# EAGLE board femtoBeacon_r2.0.1_PANELIZED (EAGLE 7.6.0), part 1 of 9
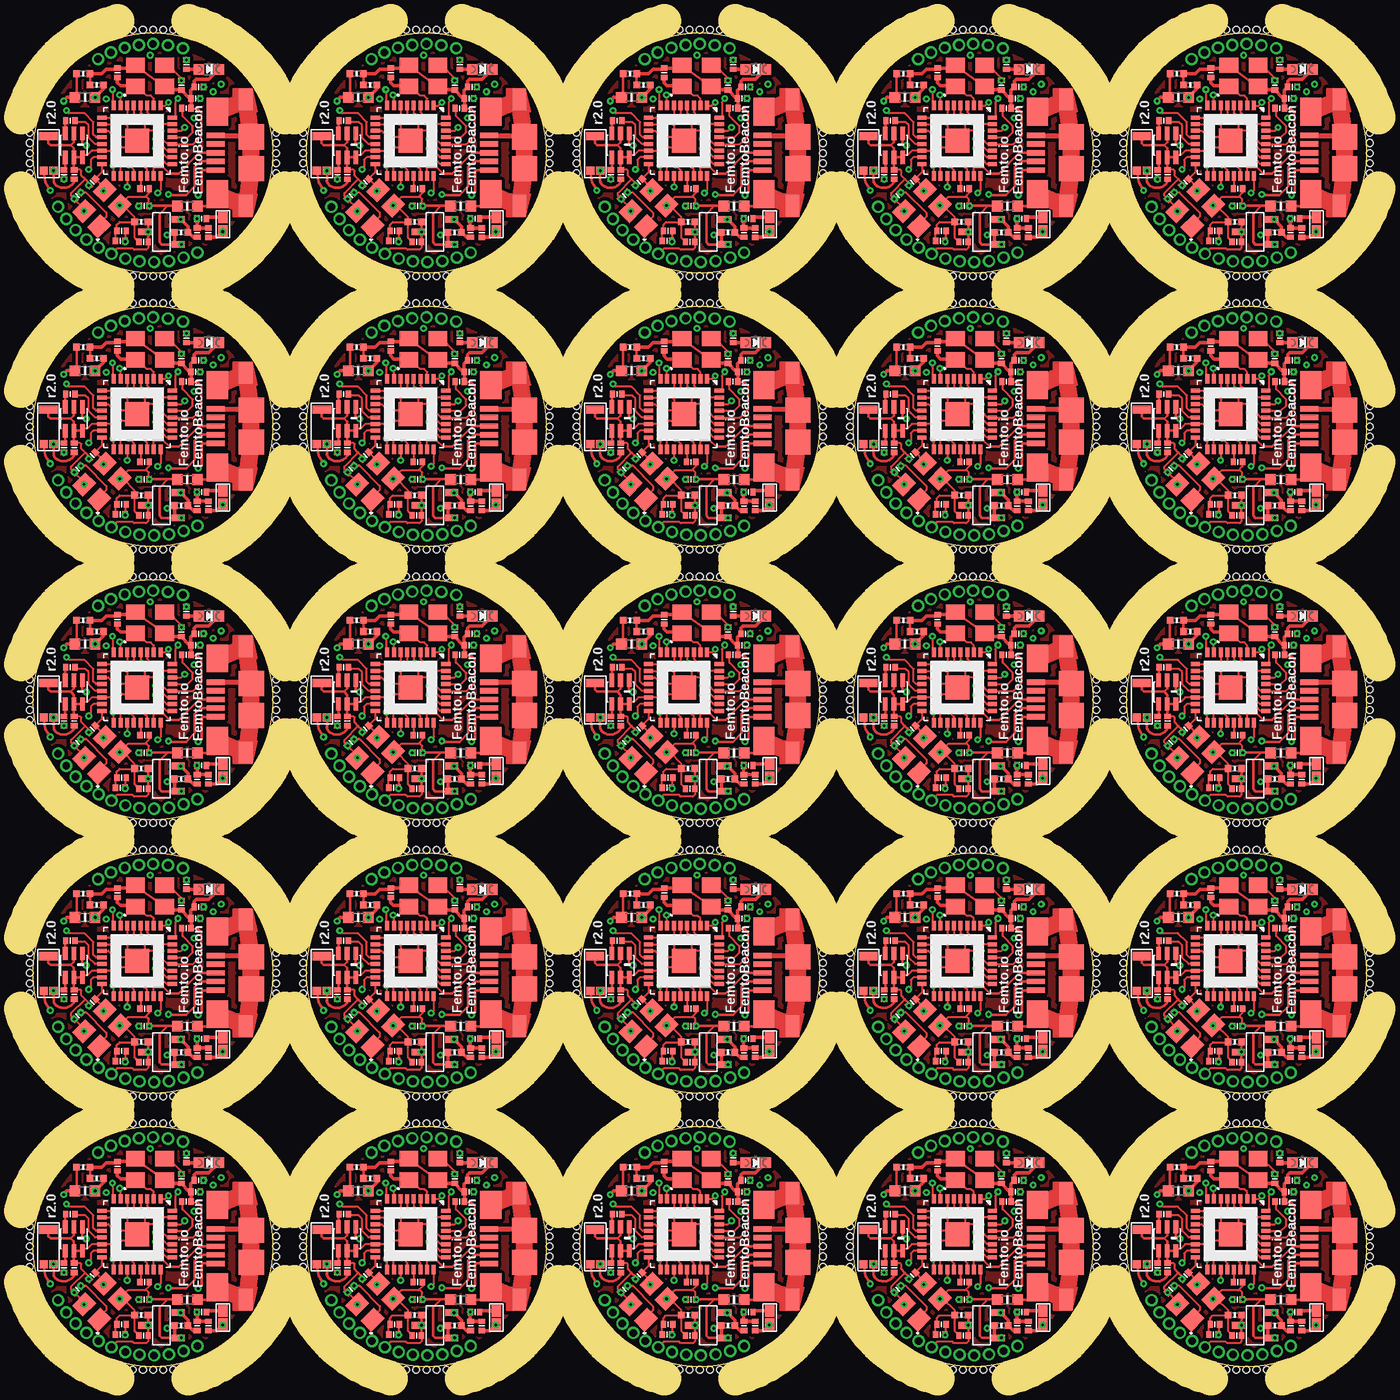
[diagram p0: board, top side]
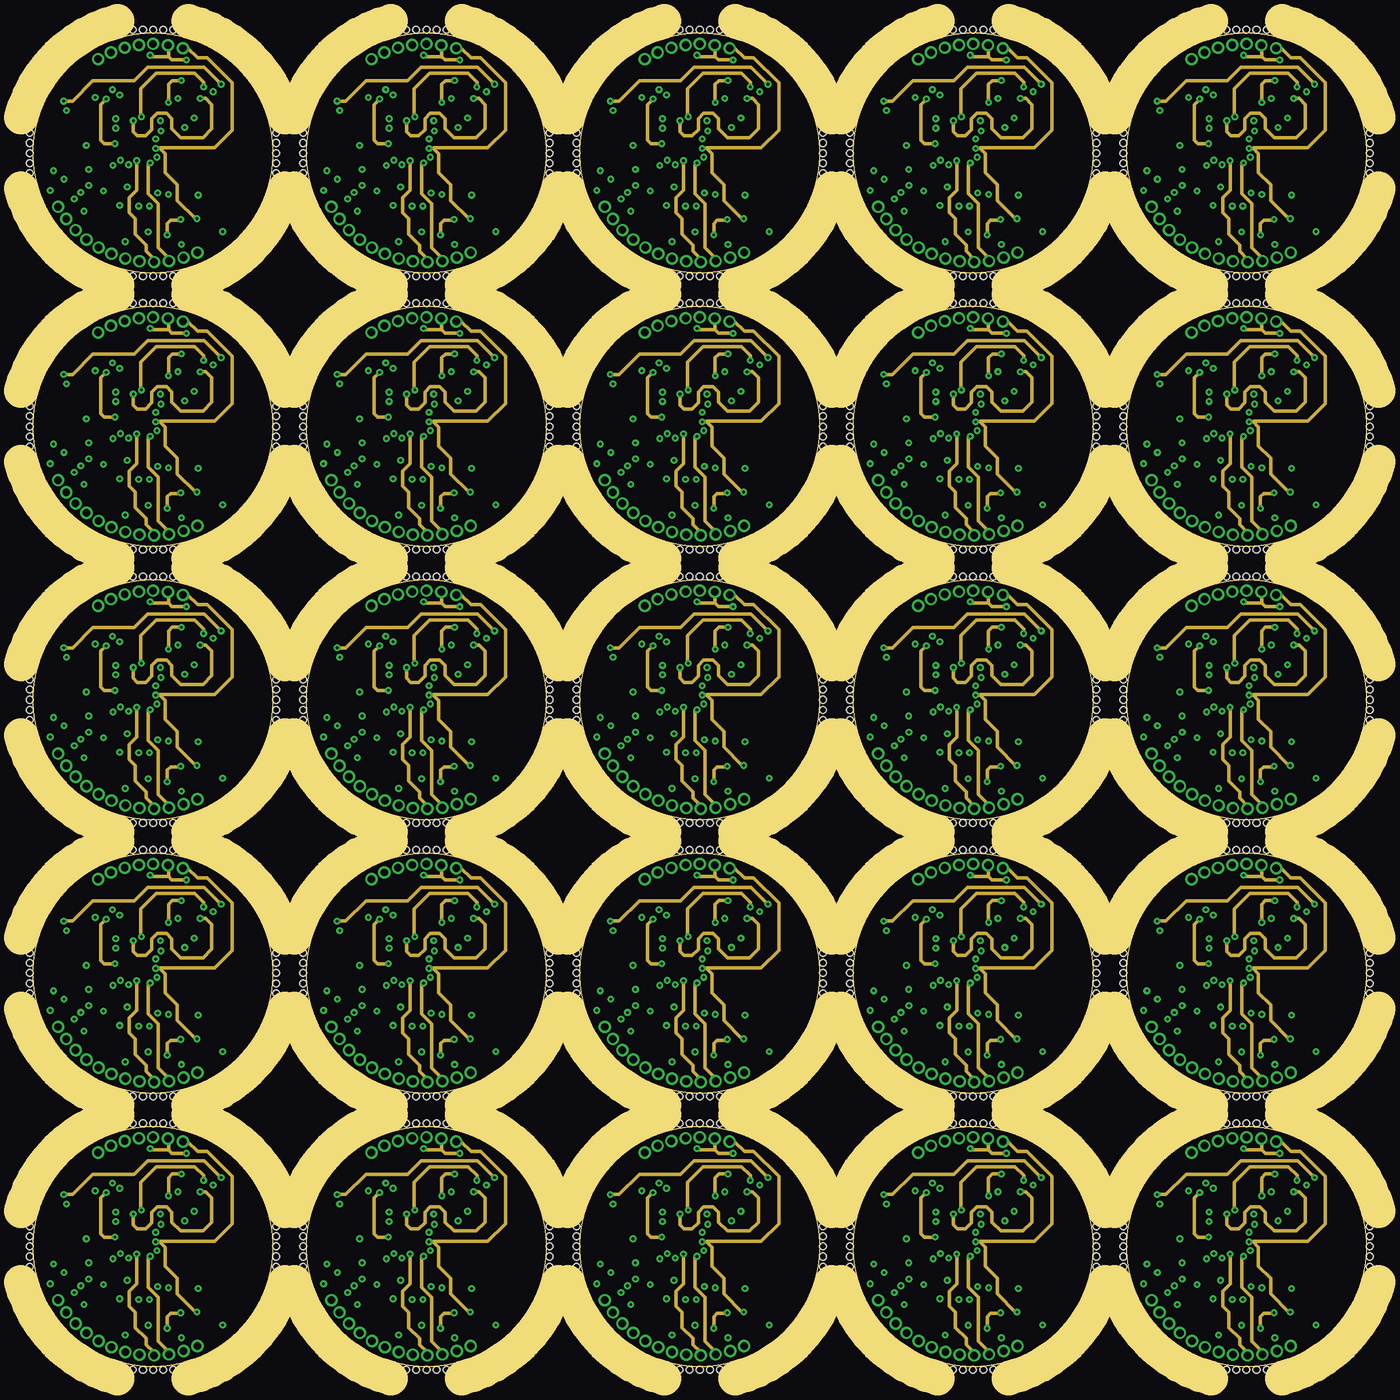
[diagram p1: board, inner layer Route2]
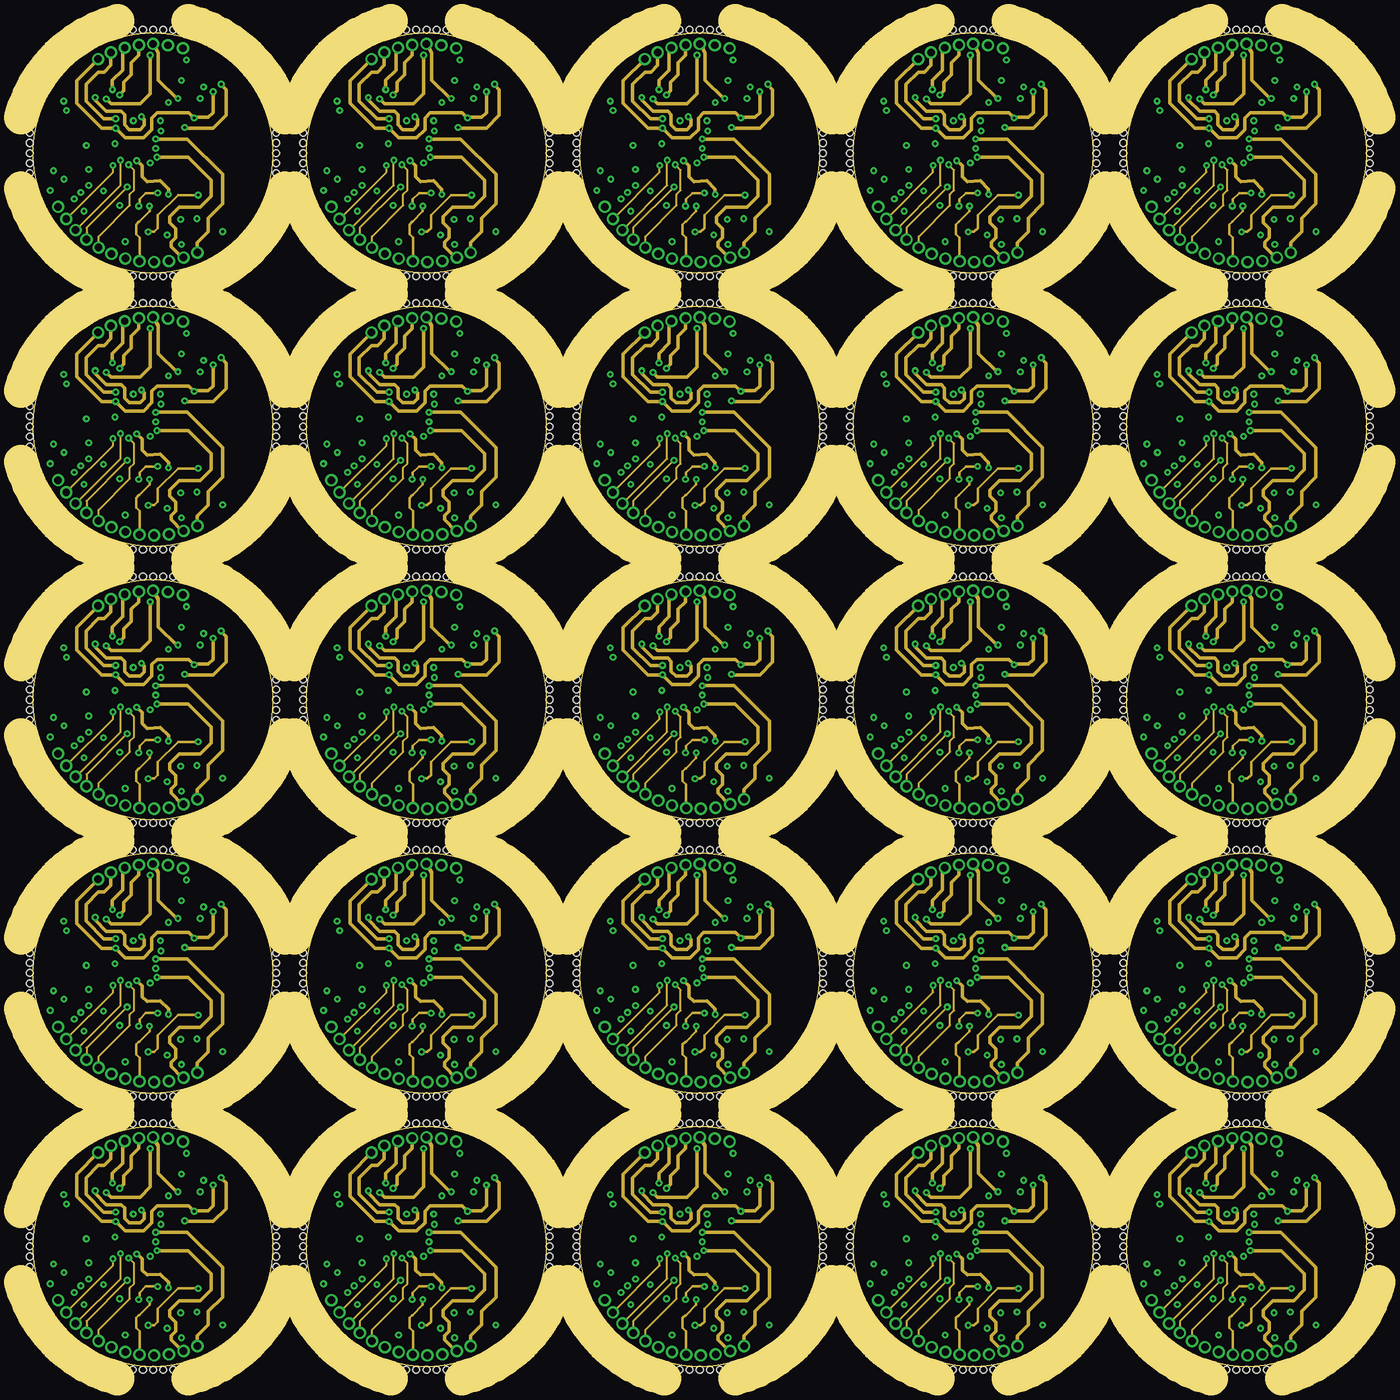
[diagram p2: board, inner layer Route15]
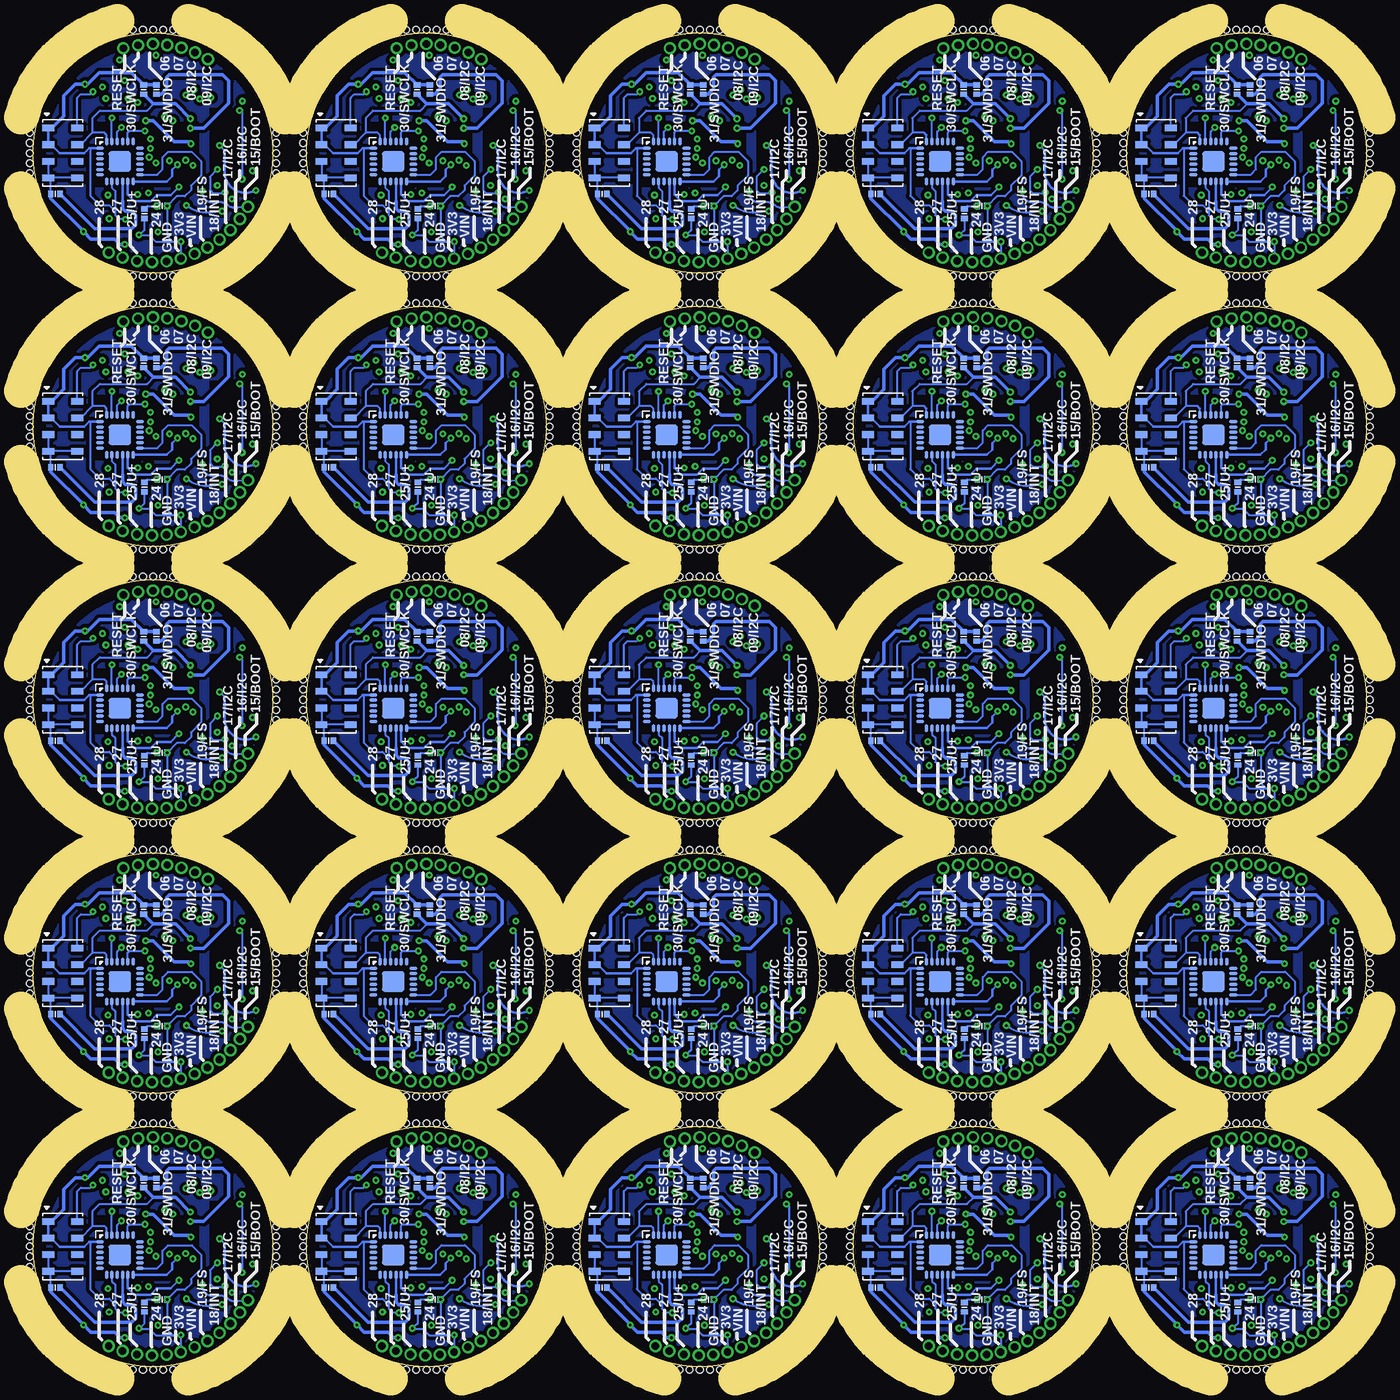
[diagram p3: board, bottom side, seen from below]

Size 100.16 x 100.16 mm. Coordinates in mm from the lower left corner, seen from the top.
Outline: circle at 9,9 radius 9
Outline: circle at 9,29.54 radius 9
Outline: circle at 9,50.08 radius 9
Outline: circle at 9,70.62 radius 9
Outline: circle at 9,91.16 radius 9
Outline: circle at 29.54,9 radius 9
Outline: circle at 29.54,29.54 radius 9
Outline: circle at 29.54,50.08 radius 9
Outline: circle at 29.54,70.62 radius 9
Outline: circle at 29.54,91.16 radius 9
Outline: circle at 50.08,9 radius 9
Outline: circle at 50.08,29.54 radius 9
Outline: circle at 50.08,50.08 radius 9
Outline: circle at 50.08,70.62 radius 9
Outline: circle at 50.08,91.16 radius 9
Outline: circle at 70.62,9 radius 9
Outline: circle at 70.62,29.54 radius 9
Outline: circle at 70.62,50.08 radius 9
Outline: circle at 70.62,70.62 radius 9
Outline: circle at 70.62,91.16 radius 9
Copper layers (1+2*15+16): Top 0.035mm / dielectric 0.7mm / Route2 0.035mm / dielectric 0.15mm / Route15 0.035mm / dielectric 0.2mm / Bottom 0.035mm
Design rules "AQS_custom_4layer": minimum track width 5mil, minimum drill 5mil, track to track 6mil, track to pad 6mil, pad to pad 6mil, via to via 6mil, smd to smd 1mil, copper to edge 15mil, drill to drill 6mil, minimum pad ring 7mil, minimum via ring 3mil, stop-mask expansion 2mil, vias tented up to drill 10mil, thermal gap 10mil
Holes 0.51 mm at -0.25,9 -0.25,9.76 -0.25,10.52 -0.25,8.24 -0.25,7.48 18.25,9 18.25,8.24 18.25,7.48 18.25,9.76 18.25,10.52 9,-0.25 8.24,-0.25 7.48,-0.25 9.76,-0.25 10.52,-0.25 9,18.25 9.76,18.25 10.52,18.25 8.24,18.25 7.48,18.25 -0.25,29.54 -0.25,30.3 -0.25,31.06 -0.25,28.78 -0.25,28.02 18.25,29.54 18.25,28.78 18.25,28.02 18.25,30.3 18.25,31.06 9,20.29 8.24,20.29 7.48,20.29 9.76,20.29 10.52,20.29 9,38.79 9.76,38.79 10.52,38.79 8.24,38.79 7.48,38.79 -0.25,50.08 -0.25,50.84 -0.25,51.6 -0.25,49.32 -0.25,48.56 18.25,50.08 18.25,49.32 18.25,48.56 18.25,50.84 18.25,51.6 9,40.83 8.24,40.83 7.48,40.83 9.76,40.83 10.52,40.83 9,59.33 9.76,59.33 10.52,59.33 8.24,59.33 7.48,59.33 -0.25,70.62 -0.25,71.38 -0.25,72.14 -0.25,69.86 -0.25,69.1 18.25,70.62 18.25,69.86 18.25,69.1 18.25,71.38 18.25,72.14 9,61.37 8.24,61.37 7.48,61.37 9.76,61.37 10.52,61.37 9,79.87 9.76,79.87 10.52,79.87 8.24,79.87 7.48,79.87 -0.25,91.16 -0.25,91.92 -0.25,92.68 -0.25,90.4 -0.25,89.64 18.25,91.16 18.25,90.4 18.25,89.64 18.25,91.92 18.25,92.68 9,81.91 8.24,81.91 7.48,81.91 9.76,81.91 10.52,81.91 9,100.41 9.76,100.41 10.52,100.41 8.24,100.41 7.48,100.41 20.29,9 20.29,9.76 20.29,10.52 20.29,8.24 20.29,7.48 38.79,9 38.79,8.24 38.79,7.48 38.79,9.76 38.79,10.52 29.54,-0.25 28.78,-0.25 28.02,-0.25 30.3,-0.25 31.06,-0.25 29.54,18.25 30.3,18.25 31.06,18.25 28.78,18.25 28.02,18.25 20.29,29.54 20.29,30.3 20.29,31.06 20.29,28.78 20.29,28.02 38.79,29.54 38.79,28.78 38.79,28.02 38.79,30.3 38.79,31.06 29.54,20.29 28.78,20.29 28.02,20.29 30.3,20.29 31.06,20.29 29.54,38.79 30.3,38.79 31.06,38.79 28.78,38.79 28.02,38.79 20.29,50.08 20.29,50.84 20.29,51.6 20.29,49.32 20.29,48.56 38.79,50.08 38.79,49.32 38.79,48.56 38.79,50.84 38.79,51.6 29.54,40.83 28.78,40.83 28.02,40.83 30.3,40.83 31.06,40.83 29.54,59.33 30.3,59.33 31.06,59.33 28.78,59.33 28.02,59.33 20.29,70.62 20.29,71.38 20.29,72.14 20.29,69.86 20.29,69.1 38.79,70.62 38.79,69.86 38.79,69.1 38.79,71.38 38.79,72.14 29.54,61.37 28.78,61.37 28.02,61.37 30.3,61.37 31.06,61.37 29.54,79.87 30.3,79.87 31.06,79.87 28.78,79.87 28.02,79.87 20.29,91.16 20.29,91.92 20.29,92.68 20.29,90.4 20.29,89.64 38.79,91.16 38.79,90.4 38.79,89.64 38.79,91.92 38.79,92.68 29.54,81.91 28.78,81.91 28.02,81.91 30.3,81.91 31.06,81.91 29.54,100.41 30.3,100.41 31.06,100.41 28.78,100.41 28.02,100.41 40.83,9 40.83,9.76 40.83,10.52 40.83,8.24 40.83,7.48 59.33,9 59.33,8.24 59.33,7.48 59.33,9.76 59.33,10.52 50.08,-0.25 49.32,-0.25 48.56,-0.25 50.84,-0.25 51.6,-0.25 50.08,18.25 50.84,18.25 51.6,18.25 49.32,18.25 48.56,18.25 40.83,29.54 40.83,30.3 40.83,31.06 40.83,28.78 40.83,28.02 59.33,29.54 59.33,28.78 59.33,28.02 59.33,30.3 59.33,31.06 50.08,20.29 49.32,20.29 48.56,20.29 50.84,20.29 51.6,20.29 50.08,38.79 50.84,38.79 51.6,38.79 49.32,38.79 48.56,38.79 40.83,50.08 40.83,50.84 40.83,51.6 40.83,49.32 40.83,48.56 59.33,50.08 59.33,49.32 59.33,48.56 59.33,50.84 59.33,51.6 50.08,40.83 49.32,40.83 48.56,40.83 50.84,40.83 51.6,40.83 50.08,59.33 50.84,59.33 51.6,59.33 49.32,59.33 48.56,59.33 40.83,70.62 40.83,71.38 40.83,72.14 40.83,69.86 40.83,69.1 59.33,70.62 59.33,69.86 59.33,69.1 59.33,71.38 59.33,72.14 50.08,61.37 49.32,61.37 48.56,61.37 50.84,61.37 51.6,61.37 50.08,79.87 50.84,79.87 51.6,79.87 49.32,79.87 48.56,79.87 40.83,91.16 40.83,91.92 40.83,92.68 40.83,90.4 40.83,89.64 59.33,91.16 59.33,90.4 59.33,89.64 59.33,91.92 59.33,92.68 50.08,81.91 49.32,81.91 48.56,81.91 50.84,81.91 51.6,81.91 50.08,100.41 50.84,100.41 51.6,100.41 49.32,100.41 48.56,100.41 61.37,9 61.37,9.76 61.37,10.52 61.37,8.24 61.37,7.48 79.87,9 79.87,8.24 79.87,7.48 79.87,9.76 79.87,10.52 70.62,-0.25 69.86,-0.25 69.1,-0.25 71.38,-0.25 72.14,-0.25 70.62,18.25 71.38,18.25 72.14,18.25 69.86,18.25 69.1,18.25 61.37,29.54 61.37,30.3 61.37,31.06 61.37,28.78 61.37,28.02 79.87,29.54 79.87,28.78 79.87,28.02 79.87,30.3 79.87,31.06 70.62,20.29 69.86,20.29 69.1,20.29 71.38,20.29 72.14,20.29 70.62,38.79 71.38,38.79 72.14,38.79 69.86,38.79 69.1,38.79 61.37,50.08 61.37,50.84 61.37,51.6 61.37,49.32 61.37,48.56 79.87,50.08 79.87,49.32 79.87,48.56 79.87,50.84 79.87,51.6 70.62,40.83 69.86,40.83 69.1,40.83 71.38,40.83 72.14,40.83 70.62,59.33 71.38,59.33 72.14,59.33 69.86,59.33 69.1,59.33 61.37,70.62 61.37,71.38 61.37,72.14 61.37,69.86 61.37,69.1 79.87,70.62 79.87,69.86 79.87,69.1 79.87,71.38 79.87,72.14 70.62,61.37 69.86,61.37 69.1,61.37 71.38,61.37 72.14,61.37 70.62,79.87 71.38,79.87 72.14,79.87 69.86,79.87 69.1,79.87 61.37,91.16 61.37,91.92 61.37,92.68 61.37,90.4 61.37,89.64 79.87,91.16 79.87,90.4 79.87,89.64 79.87,91.92 79.87,92.68 70.62,81.91 69.86,81.91 69.1,81.91 71.38,81.91 72.14,81.91 70.62,100.41 71.38,100.41 72.14,100.41 69.86,100.41 69.1,100.41 81.91,9 81.91,9.76 81.91,10.52 81.91,8.24 81.91,7.48 100.41,9 100.41,8.24 100.41,7.48 100.41,9.76 100.41,10.52 91.16,-0.25 90.4,-0.25 89.64,-0.25 91.92,-0.25 92.68,-0.25 91.16,18.25 91.92,18.25 92.68,18.25 90.4,18.25 89.64,18.25 81.91,29.54 81.91,30.3 81.91,31.06 81.91,28.78 81.91,28.02 100.41,29.54 100.41,28.78 100.41,28.02 100.41,30.3 100.41,31.06 91.16,20.29 90.4,20.29 89.64,20.29 91.92,20.29 92.68,20.29 91.16,38.79 91.92,38.79 92.68,38.79 90.4,38.79 89.64,38.79 81.91,50.08 81.91,50.84 81.91,51.6 81.91,49.32 81.91,48.56 100.41,50.08 100.41,49.32 100.41,48.56 100.41,50.84 100.41,51.6 91.16,40.83 90.4,40.83 89.64,40.83 91.92,40.83 92.68,40.83 91.16,59.33 91.92,59.33 92.68,59.33 90.4,59.33 89.64,59.33 81.91,70.62 81.91,71.38 81.91,72.14 81.91,69.86 81.91,69.1 100.41,70.62 100.41,69.86 100.41,69.1 100.41,71.38 100.41,72.14 91.16,61.37 90.4,61.37 89.64,61.37 91.92,61.37 92.68,61.37 91.16,79.87 91.92,79.87 92.68,79.87 90.4,79.87 89.64,79.87 81.91,91.16 81.91,91.92 81.91,92.68 81.91,90.4 81.91,89.64 100.41,91.16 100.41,90.4 100.41,89.64 100.41,91.92 100.41,92.68 91.16,81.91 90.4,81.91 89.64,81.91 91.92,81.91 92.68,81.91 91.16,100.41 91.92,100.41 92.68,100.41 90.4,100.41 89.64,100.41
Milling: 100 lines

## Footprints (pad centres in the part's own frame; a part is rotated, then mirrored left to right if it is on the bottom)
ANT_BAR = smd 0.62 x 0.61: 1 -1.3,0.37; 2 -1.3,-0.38 | smd 0.62 x 1.36: 3 1.3,0
0805_BALUN = smd 1 x 0.35: 1 -0.9,0.65; 2 -0.9,0; 3 -0.9,-0.65; 4 0.9,-0.65; 5 0.9,0; 6 0.9,0.65
MS5611-01BA03 = smd 0.9 x 0.5: 1 -1.1,1.875; 2 -1.1,0.625; 3 -1.1,-0.625; 4 -1.1,-1.875; 5 1.1,-1.875; 6 1.1,-0.625; 7 1.1,0.625; 8 1.1,1.875
SPST_SMD = smd 0.889 x 0.699: 1 -0.508,0; 2 0.508,0
PART = smd 0.4 x 0.5: 1 -0.35,0; 2 0.35,0
_0402MP = smd 0.5 x 0.5: 1 -0.508,0; 2 0.508,0
_0603MP = smd 0.8 x 0.8: 1 -0.762,0; 2 0.762,0
QFN32 = smd 0.7 x 0.3: 1 -2.65,1.75; 2 -2.65,1.25; 3 -2.65,0.75; 4 -2.65,0.25; 5 -2.65,-0.25; 6 -2.65,-0.75; 7 -2.65,-1.25; 8 -2.65,-1.75; 17 2.65,-1.75; 18 2.65,-1.25; 19 2.65,-0.75; 20 2.65,-0.25; 21 2.65,0.25; 22 2.65,0.75; 23 2.65,1.25; 24 2.65,1.75 | smd 0.3 x 0.7: 9 -1.75,-2.65; 10 -1.25,-2.65; 11 -0.75,-2.65; 12 -0.25,-2.65; 13 0.25,-2.65; 14 0.75,-2.65; 15 1.25,-2.65; 16 1.75,-2.65; 25 1.75,2.65; 26 1.25,2.65; 27 0.75,2.65; 28 0.25,2.65; 29 -0.25,2.65; 30 -0.75,2.65; 31 -1.25,2.65; 32 -1.75,2.65 | smd 1.8 x 1.8: 33 0,0
QFN_3X3MM = smd 0.6 x 0.25: P$1 -1.5,1; P$2 -1.5,0.6; P$3 -1.5,0.2; P$4 -1.5,-0.2; P$5 -1.5,-0.6; P$6 -1.5,-1; P$13 1.5,-1; P$14 1.5,-0.6; P$15 1.5,-0.2; P$16 1.5,0.2; P$17 1.5,0.6; P$18 1.5,1 | smd 0.25 x 0.6: P$7 -1,-1.5; P$8 -0.6,-1.5; P$9 -0.2,-1.5; P$10 0.2,-1.5; P$11 0.6,-1.5; P$12 1,-1.5; P$19 1,1.5; P$20 0.6,1.5; P$21 0.2,1.5; P$22 -0.2,1.5; P$23 -0.6,1.5; P$24 -1,1.5 | smd 1.7 x 1.54: P$25 0,0
MCP1700T-3302E/TT = smd 0.5 x 1: GND -0.95,-1.25; VIN 0,1.25; VOUT 0.95,-1.25
CHIPLED_0603_NOOUTLINE = smd 0.8 x 0.8: A 0,-0.75; C 0,0.75
1X1_ROUND = drill 0.559 pad 0.864: P$1 0,0
USB_MICROB_PACKAGE = smd 0.4 x 1.35: 1 -1.3,1.47; 2 -0.64,1.47; 3 0,1.47; 4 0.66,1.47; 5 1.3,1.47 | smd 2.1 x 1.6: 6 -3.1,1.35; 11 3.1,1.35 | smd 1.6 x 1: 7 -4,-0.8; 10 4,-0.8 | smd 1.9 x 1.9: 8 -1.2,-1.2; 9 1.2,-1.2
TSX-3225 = smd 1.4 x 1.15: 1 -1.1,-0.8; 2 1.1,-0.8; 3 1.1,0.8; 4 -1.1,0.8

## Placement (x,y rotation side)
ANT  PULSE_ANT_2.4GHZ  [ANT_BAR]  1.14,8.97 90 top
ANT1  PULSE_ANT_2.4GHZ  [ANT_BAR]  1.14,29.51 90 top
ANT2  PULSE_ANT_2.4GHZ  [ANT_BAR]  1.14,50.05 90 top
ANT3  PULSE_ANT_2.4GHZ  [ANT_BAR]  1.14,70.59 90 top
ANT4  PULSE_ANT_2.4GHZ  [ANT_BAR]  1.14,91.13 90 top
ANT5  PULSE_ANT_2.4GHZ  [ANT_BAR]  21.68,8.97 90 top
ANT6  PULSE_ANT_2.4GHZ  [ANT_BAR]  21.68,29.51 90 top
ANT7  PULSE_ANT_2.4GHZ  [ANT_BAR]  21.68,50.05 90 top
ANT8  PULSE_ANT_2.4GHZ  [ANT_BAR]  21.68,70.59 90 top
ANT9  PULSE_ANT_2.4GHZ  [ANT_BAR]  21.68,91.13 90 top
ANT10  PULSE_ANT_2.4GHZ  [ANT_BAR]  42.22,8.97 90 top
ANT11  PULSE_ANT_2.4GHZ  [ANT_BAR]  42.22,29.51 90 top
ANT12  PULSE_ANT_2.4GHZ  [ANT_BAR]  42.22,50.05 90 top
ANT13  PULSE_ANT_2.4GHZ  [ANT_BAR]  42.22,70.59 90 top
ANT14  PULSE_ANT_2.4GHZ  [ANT_BAR]  42.22,91.13 90 top
ANT15  PULSE_ANT_2.4GHZ  [ANT_BAR]  62.76,8.97 90 top
ANT16  PULSE_ANT_2.4GHZ  [ANT_BAR]  62.76,29.51 90 top
ANT17  PULSE_ANT_2.4GHZ  [ANT_BAR]  62.76,50.05 90 top
ANT18  PULSE_ANT_2.4GHZ  [ANT_BAR]  62.76,70.59 90 top
ANT19  PULSE_ANT_2.4GHZ  [ANT_BAR]  62.76,91.13 90 top
ANT20  PULSE_ANT_2.4GHZ  [ANT_BAR]  83.3,8.97 90 top
ANT21  PULSE_ANT_2.4GHZ  [ANT_BAR]  83.3,29.51 90 top
ANT22  PULSE_ANT_2.4GHZ  [ANT_BAR]  83.3,50.05 90 top
ANT23  PULSE_ANT_2.4GHZ  [ANT_BAR]  83.3,70.59 90 top
ANT24  PULSE_ANT_2.4GHZ  [ANT_BAR]  83.3,91.13 90 top
BAL  JOHANSON_2450BM15A0015E  [0805_BALUN]  3.05,9.58 270 top
BAL1  JOHANSON_2450BM15A0015E  [0805_BALUN]  3.05,30.12 270 top
BAL2  JOHANSON_2450BM15A0015E  [0805_BALUN]  3.05,50.66 270 top
BAL3  JOHANSON_2450BM15A0015E  [0805_BALUN]  3.05,71.2 270 top
BAL4  JOHANSON_2450BM15A0015E  [0805_BALUN]  3.05,91.74 270 top
BAL5  JOHANSON_2450BM15A0015E  [0805_BALUN]  23.59,9.58 270 top
BAL6  JOHANSON_2450BM15A0015E  [0805_BALUN]  23.59,30.12 270 top
BAL7  JOHANSON_2450BM15A0015E  [0805_BALUN]  23.59,50.66 270 top
BAL8  JOHANSON_2450BM15A0015E  [0805_BALUN]  23.59,71.2 270 top
BAL9  JOHANSON_2450BM15A0015E  [0805_BALUN]  23.59,91.74 270 top
BAL10  JOHANSON_2450BM15A0015E  [0805_BALUN]  44.13,9.58 270 top
BAL11  JOHANSON_2450BM15A0015E  [0805_BALUN]  44.13,30.12 270 top
BAL12  JOHANSON_2450BM15A0015E  [0805_BALUN]  44.13,50.66 270 top
BAL13  JOHANSON_2450BM15A0015E  [0805_BALUN]  44.13,71.2 270 top
BAL14  JOHANSON_2450BM15A0015E  [0805_BALUN]  44.13,91.74 270 top
BAL15  JOHANSON_2450BM15A0015E  [0805_BALUN]  64.67,9.58 270 top
BAL16  JOHANSON_2450BM15A0015E  [0805_BALUN]  64.67,30.12 270 top
BAL17  JOHANSON_2450BM15A0015E  [0805_BALUN]  64.67,50.66 270 top
BAL18  JOHANSON_2450BM15A0015E  [0805_BALUN]  64.67,71.2 270 top
BAL19  JOHANSON_2450BM15A0015E  [0805_BALUN]  64.67,91.74 270 top
BAL20  JOHANSON_2450BM15A0015E  [0805_BALUN]  85.21,9.58 270 top
BAL21  JOHANSON_2450BM15A0015E  [0805_BALUN]  85.21,30.12 270 top
BAL22  JOHANSON_2450BM15A0015E  [0805_BALUN]  85.21,50.66 270 top
BAL23  JOHANSON_2450BM15A0015E  [0805_BALUN]  85.21,71.2 270 top
BAL24  JOHANSON_2450BM15A0015E  [0805_BALUN]  85.21,91.74 270 top
BARO  MS5611-01BA03  [MS5611-01BA03]  15.79,9.01 0 bottom
BARO1  MS5611-01BA03  [MS5611-01BA03]  15.79,29.55 0 bottom
BARO2  MS5611-01BA03  [MS5611-01BA03]  15.79,50.09 0 bottom
BARO3  MS5611-01BA03  [MS5611-01BA03]  15.79,70.63 0 bottom
BARO4  MS5611-01BA03  [MS5611-01BA03]  15.79,91.17 0 bottom
BARO5  MS5611-01BA03  [MS5611-01BA03]  36.33,9.01 0 bottom
BARO6  MS5611-01BA03  [MS5611-01BA03]  36.33,29.55 0 bottom
BARO7  MS5611-01BA03  [MS5611-01BA03]  36.33,50.09 0 bottom
BARO8  MS5611-01BA03  [MS5611-01BA03]  36.33,70.63 0 bottom
BARO9  MS5611-01BA03  [MS5611-01BA03]  36.33,91.17 0 bottom
BARO10  MS5611-01BA03  [MS5611-01BA03]  56.87,9.01 0 bottom
BARO11  MS5611-01BA03  [MS5611-01BA03]  56.87,29.55 0 bottom
BARO12  MS5611-01BA03  [MS5611-01BA03]  56.87,50.09 0 bottom
BARO13  MS5611-01BA03  [MS5611-01BA03]  56.87,70.63 0 bottom
BARO14  MS5611-01BA03  [MS5611-01BA03]  56.87,91.17 0 bottom
BARO15  MS5611-01BA03  [MS5611-01BA03]  77.41,9.01 0 bottom
BARO16  MS5611-01BA03  [MS5611-01BA03]  77.41,29.55 0 bottom
BARO17  MS5611-01BA03  [MS5611-01BA03]  77.41,50.09 0 bottom
BARO18  MS5611-01BA03  [MS5611-01BA03]  77.41,70.63 0 bottom
BARO19  MS5611-01BA03  [MS5611-01BA03]  77.41,91.17 0 bottom
BARO20  MS5611-01BA03  [MS5611-01BA03]  97.95,9.01 0 bottom
BARO21  MS5611-01BA03  [MS5611-01BA03]  97.95,29.55 0 bottom
BARO22  MS5611-01BA03  [MS5611-01BA03]  97.95,50.09 0 bottom
BARO23  MS5611-01BA03  [MS5611-01BA03]  97.95,70.63 0 bottom
BARO24  MS5611-01BA03  [MS5611-01BA03]  97.95,91.17 0 bottom
BTN  DNP  [SPST_SMD]  14.25,3.66 270 top
BTN1  DNP  [SPST_SMD]  14.25,24.2 270 top
BTN2  DNP  [SPST_SMD]  14.25,44.74 270 top
BTN3  DNP  [SPST_SMD]  14.25,65.28 270 top
BTN4  DNP  [SPST_SMD]  14.25,85.82 270 top
BTN5  DNP  [SPST_SMD]  34.79,3.66 270 top
BTN6  DNP  [SPST_SMD]  34.79,24.2 270 top
BTN7  DNP  [SPST_SMD]  34.79,44.74 270 top
BTN8  DNP  [SPST_SMD]  34.79,65.28 270 top
BTN9  DNP  [SPST_SMD]  34.79,85.82 270 top
BTN10  DNP  [SPST_SMD]  55.33,3.66 270 top
BTN11  DNP  [SPST_SMD]  55.33,24.2 270 top
BTN12  DNP  [SPST_SMD]  55.33,44.74 270 top
BTN13  DNP  [SPST_SMD]  55.33,65.28 270 top
BTN14  DNP  [SPST_SMD]  55.33,85.82 270 top
BTN15  DNP  [SPST_SMD]  75.87,3.66 270 top
BTN16  DNP  [SPST_SMD]  75.87,24.2 270 top
BTN17  DNP  [SPST_SMD]  75.87,44.74 270 top
BTN18  DNP  [SPST_SMD]  75.87,65.28 270 top
BTN19  DNP  [SPST_SMD]  75.87,85.82 270 top
BTN20  DNP  [SPST_SMD]  96.41,3.66 270 top
BTN21  DNP  [SPST_SMD]  96.41,24.2 270 top
BTN22  DNP  [SPST_SMD]  96.41,44.74 270 top
BTN23  DNP  [SPST_SMD]  96.41,65.28 270 top
BTN24  DNP  [SPST_SMD]  96.41,85.82 270 top
C1  0.1uF  [PART]  13.16,3.02 270 top
C2  0.1uF  [PART]  8.36,6.32 0 top
C3  10pF  [PART]  3.33,5.79 45 top
C4  10pF  [PART]  4.42,6.81 225 top
C5  2.2uF  [_0402MP]  11.13,3.05 180 top
C6  2.2uF  [_0402MP]  8.13,3.83 180 top
C7  0.47uF  [PART]  8.28,2.31 180 top
C8  0.1uF  [PART]  12.45,13.97 180 top
C9  0.1uF  [PART]  11.51,12.37 0 top
C10  0.1uF  [PART]  6.63,3.15 180 top
C11  22pF, C0G, 5%  [PART]  2.79,11.43 180 top
C12  22pF, C0G, 5%  [PART]  2.31,7.39 90 top
C13  DNP  [PART]  3.07,7.39 90 top
C14  9pF  [PART]  6.32,15.04 270 top
C15  9pF  [PART]  11.13,14.1 270 top
C16  0.1uF  [PART]  8.33,5.02 0 top
C17  0.1uF  [PART]  12.19,13.11 180 top
C18  0.1uF  [PART]  13.16,23.56 270 top
C19  0.1uF  [PART]  8.36,26.86 0 top
C20  2.2uF  [_0402MP]  11.13,23.59 180 top
C21  10uF  [_0402MP]  3.76,14.96 180 top
C22  10uF  [_0402MP]  4.78,14.12 0 top
C23  2.2uF  [_0402MP]  8.13,24.37 180 top
C24  0.47uF  [PART]  8.28,22.85 180 top
C25  0.1uF  [PART]  9.65,24.99 90 bottom
C26  0.1uF  [PART]  12.45,34.51 180 top
C27  0.1uF  [PART]  11.51,32.91 0 top
C28  0.1uF  [PART]  8.33,25.56 0 top
C29  0.1uF  [PART]  9.65,4.45 90 bottom
C30  0.1uF  [PART]  8.33,5.02 0 bottom
C31  10nF  [PART]  6.53,2.39 0 top
C32  0.1uF  [PART]  16.33,5.92 180 bottom
C33  0.1uF  [PART]  12.19,33.65 180 top
C34  10uF  [_0402MP]  3.76,35.5 180 top
C35  10uF  [_0402MP]  4.78,34.66 0 top
C36  0.1uF  [PART]  6.63,23.69 180 top
C37  10pF  [PART]  3.33,26.33 45 top
C38  10pF  [PART]  4.42,27.35 225 top
C39  22pF, C0G, 5%  [PART]  2.79,31.97 180 top
C40  22pF, C0G, 5%  [PART]  2.31,27.93 90 top
C41  DNP  [PART]  3.07,27.93 90 top
C42  9pF  [PART]  6.32,35.58 270 top
C43  9pF  [PART]  11.13,34.64 270 top
C44  10nF  [PART]  6.53,22.93 0 top
C45  0.1uF  [PART]  8.33,25.56 0 bottom
C46  0.1uF  [PART]  16.33,26.46 180 bottom
C47  0.1uF  [PART]  13.16,44.1 270 top
C48  0.1uF  [PART]  8.36,47.4 0 top
C49  2.2uF  [_0402MP]  11.13,44.13 180 top
C50  2.2uF  [_0402MP]  8.13,44.91 180 top
C51  0.47uF  [PART]  8.28,43.39 180 top
C52  0.1uF  [PART]  9.65,45.53 90 bottom
C53  0.1uF  [PART]  12.45,55.05 180 top
C54  0.1uF  [PART]  11.51,53.45 0 top
C55  0.1uF  [PART]  8.33,46.1 0 top
C56  0.1uF  [PART]  12.19,54.19 180 top
C57  10uF  [_0402MP]  3.76,56.04 180 top
C58  10uF  [_0402MP]  4.78,55.2 0 top
C59  0.1uF  [PART]  6.63,44.23 180 top
C60  10pF  [PART]  3.33,46.87 45 top
C61  10pF  [PART]  4.42,47.89 225 top
C62  22pF, C0G, 5%  [PART]  2.79,52.51 180 top
C63  22pF, C0G, 5%  [PART]  2.31,48.47 90 top
C64  DNP  [PART]  3.07,48.47 90 top
C65  9pF  [PART]  6.32,56.12 270 top
C66  9pF  [PART]  11.13,55.18 270 top
C67  10nF  [PART]  6.53,43.47 0 top
C68  0.1uF  [PART]  8.33,46.1 0 bottom
C69  0.1uF  [PART]  16.33,47 180 bottom
C70  0.1uF  [PART]  13.16,64.64 270 top
C71  0.1uF  [PART]  8.36,67.94 0 top
C72  2.2uF  [_0402MP]  11.13,64.67 180 top
C73  2.2uF  [_0402MP]  8.13,65.45 180 top
C74  0.47uF  [PART]  8.28,63.93 180 top
C75  0.1uF  [PART]  9.65,66.07 90 bottom
C76  0.1uF  [PART]  12.45,75.59 180 top
C77  0.1uF  [PART]  11.51,73.99 0 top
C78  0.1uF  [PART]  8.33,66.64 0 top
C79  0.1uF  [PART]  12.19,74.73 180 top
C80  10uF  [_0402MP]  3.76,76.58 180 top
C81  10uF  [_0402MP]  4.78,75.74 0 top
C82  0.1uF  [PART]  6.63,64.77 180 top
C83  10pF  [PART]  3.33,67.41 45 top
C84  10pF  [PART]  4.42,68.43 225 top
C85  22pF, C0G, 5%  [PART]  2.79,73.05 180 top
C86  22pF, C0G, 5%  [PART]  2.31,69.01 90 top
C87  DNP  [PART]  3.07,69.01 90 top
C88  9pF  [PART]  6.32,76.66 270 top
C89  9pF  [PART]  11.13,75.72 270 top
C90  10nF  [PART]  6.53,64.01 0 top
C91  0.1uF  [PART]  8.33,66.64 0 bottom
C92  0.1uF  [PART]  16.33,67.54 180 bottom
C93  0.1uF  [PART]  13.16,85.18 270 top
C94  0.1uF  [PART]  8.36,88.48 0 top
C95  2.2uF  [_0402MP]  11.13,85.21 180 top
C96  2.2uF  [_0402MP]  8.13,85.99 180 top
C97  0.47uF  [PART]  8.28,84.47 180 top
C98  0.1uF  [PART]  9.65,86.61 90 bottom
C99  0.1uF  [PART]  12.45,96.13 180 top
C100  0.1uF  [PART]  11.51,94.53 0 top
C101  0.1uF  [PART]  8.33,87.18 0 top
C102  0.1uF  [PART]  12.19,95.27 180 top
C103  10uF  [_0402MP]  3.76,97.12 180 top
C104  10uF  [_0402MP]  4.78,96.28 0 top
C105  0.1uF  [PART]  6.63,85.31 180 top
C106  10pF  [PART]  3.33,87.95 45 top
C107  10pF  [PART]  4.42,88.97 225 top
C108  22pF, C0G, 5%  [PART]  2.79,93.59 180 top
C109  22pF, C0G, 5%  [PART]  2.31,89.55 90 top
C110  DNP  [PART]  3.07,89.55 90 top
C111  9pF  [PART]  6.32,97.2 270 top
C112  9pF  [PART]  11.13,96.26 270 top
C113  10nF  [PART]  6.53,84.55 0 top
C114  0.1uF  [PART]  8.33,87.18 0 bottom
C115  0.1uF  [PART]  16.33,88.08 180 bottom
C116  0.1uF  [PART]  33.7,3.02 270 top
C117  0.1uF  [PART]  28.9,6.32 0 top
C118  2.2uF  [_0402MP]  31.67,3.05 180 top
C119  2.2uF  [_0402MP]  28.67,3.83 180 top
C120  0.47uF  [PART]  28.82,2.31 180 top
C121  0.1uF  [PART]  30.19,4.45 90 bottom
C122  0.1uF  [PART]  32.99,13.97 180 top
C123  0.1uF  [PART]  32.05,12.37 0 top
C124  0.1uF  [PART]  28.87,5.02 0 top
C125  0.1uF  [PART]  32.73,13.11 180 top
C126  10uF  [_0402MP]  24.3,14.96 180 top
C127  10uF  [_0402MP]  25.32,14.12 0 top
C128  0.1uF  [PART]  27.17,3.15 180 top
C129  10pF  [PART]  23.87,5.79 45 top
C130  10pF  [PART]  24.96,6.81 225 top
C131  22pF, C0G, 5%  [PART]  23.33,11.43 180 top
C132  22pF, C0G, 5%  [PART]  22.85,7.39 90 top
C133  DNP  [PART]  23.61,7.39 90 top
C134  9pF  [PART]  26.86,15.04 270 top
C135  9pF  [PART]  31.67,14.1 270 top
C136  10nF  [PART]  27.07,2.39 0 top
C137  0.1uF  [PART]  28.87,5.02 0 bottom
C138  0.1uF  [PART]  36.87,5.92 180 bottom
C139  0.1uF  [PART]  33.7,23.56 270 top
C140  0.1uF  [PART]  28.9,26.86 0 top
C141  2.2uF  [_0402MP]  31.67,23.59 180 top
C142  2.2uF  [_0402MP]  28.67,24.37 180 top
C143  0.47uF  [PART]  28.82,22.85 180 top
C144  0.1uF  [PART]  30.19,24.99 90 bottom
C145  0.1uF  [PART]  32.99,34.51 180 top
C146  0.1uF  [PART]  32.05,32.91 0 top
C147  0.1uF  [PART]  28.87,25.56 0 top
C148  0.1uF  [PART]  32.73,33.65 180 top
C149  10uF  [_0402MP]  24.3,35.5 180 top
C150  10uF  [_0402MP]  25.32,34.66 0 top
C151  0.1uF  [PART]  27.17,23.69 180 top
C152  10pF  [PART]  23.87,26.33 45 top
C153  10pF  [PART]  24.96,27.35 225 top
C154  22pF, C0G, 5%  [PART]  23.33,31.97 180 top
C155  22pF, C0G, 5%  [PART]  22.85,27.93 90 top
C156  DNP  [PART]  23.61,27.93 90 top
C157  9pF  [PART]  26.86,35.58 270 top
C158  9pF  [PART]  31.67,34.64 270 top
C159  10nF  [PART]  27.07,22.93 0 top
C160  0.1uF  [PART]  28.87,25.56 0 bottom
C161  0.1uF  [PART]  36.87,26.46 180 bottom
C162  0.1uF  [PART]  33.7,44.1 270 top
C163  0.1uF  [PART]  28.9,47.4 0 top
C164  2.2uF  [_0402MP]  31.67,44.13 180 top
C165  2.2uF  [_0402MP]  28.67,44.91 180 top
C166  0.47uF  [PART]  28.82,43.39 180 top
C167  0.1uF  [PART]  30.19,45.53 90 bottom
C168  0.1uF  [PART]  32.99,55.05 180 top
C169  0.1uF  [PART]  32.05,53.45 0 top
C170  0.1uF  [PART]  28.87,46.1 0 top
C171  0.1uF  [PART]  32.73,54.19 180 top
C172  10uF  [_0402MP]  24.3,56.04 180 top
C173  10uF  [_0402MP]  25.32,55.2 0 top
C174  0.1uF  [PART]  27.17,44.23 180 top
C175  10pF  [PART]  23.87,46.87 45 top
C176  10pF  [PART]  24.96,47.89 225 top
C177  22pF, C0G, 5%  [PART]  23.33,52.51 180 top
C178  22pF, C0G, 5%  [PART]  22.85,48.47 90 top
C179  DNP  [PART]  23.61,48.47 90 top
C180  9pF  [PART]  26.86,56.12 270 top
C181  9pF  [PART]  31.67,55.18 270 top
C182  10nF  [PART]  27.07,43.47 0 top
C183  0.1uF  [PART]  28.87,46.1 0 bottom
C184  0.1uF  [PART]  36.87,47 180 bottom
C185  0.1uF  [PART]  33.7,64.64 270 top
C186  0.1uF  [PART]  28.9,67.94 0 top
C187  2.2uF  [_0402MP]  31.67,64.67 180 top
C188  2.2uF  [_0402MP]  28.67,65.45 180 top
C189  0.47uF  [PART]  28.82,63.93 180 top
C190  0.1uF  [PART]  30.19,66.07 90 bottom
C191  0.1uF  [PART]  32.99,75.59 180 top
C192  0.1uF  [PART]  32.05,73.99 0 top
C193  0.1uF  [PART]  28.87,66.64 0 top
C194  0.1uF  [PART]  32.73,74.73 180 top
C195  10uF  [_0402MP]  24.3,76.58 180 top
C196  10uF  [_0402MP]  25.32,75.74 0 top
C197  0.1uF  [PART]  27.17,64.77 180 top
C198  10pF  [PART]  23.87,67.41 45 top
C199  10pF  [PART]  24.96,68.43 225 top
C200  22pF, C0G, 5%  [PART]  23.33,73.05 180 top
C201  22pF, C0G, 5%  [PART]  22.85,69.01 90 top
C202  DNP  [PART]  23.61,69.01 90 top
C203  9pF  [PART]  26.86,76.66 270 top
C204  9pF  [PART]  31.67,75.72 270 top
C205  10nF  [PART]  27.07,64.01 0 top
C206  0.1uF  [PART]  28.87,66.64 0 bottom
C207  0.1uF  [PART]  36.87,67.54 180 bottom
C208  0.1uF  [PART]  33.7,85.18 270 top
C209  0.1uF  [PART]  28.9,88.48 0 top
C210  2.2uF  [_0402MP]  31.67,85.21 180 top
C211  2.2uF  [_0402MP]  28.67,85.99 180 top
C212  0.47uF  [PART]  28.82,84.47 180 top
C213  0.1uF  [PART]  30.19,86.61 90 bottom
C214  0.1uF  [PART]  32.99,96.13 180 top
C215  0.1uF  [PART]  32.05,94.53 0 top
C216  0.1uF  [PART]  28.87,87.18 0 top
C217  0.1uF  [PART]  32.73,95.27 180 top
C218  10uF  [_0402MP]  24.3,97.12 180 top
C219  10uF  [_0402MP]  25.32,96.28 0 top
C220  0.1uF  [PART]  27.17,85.31 180 top
C221  10pF  [PART]  23.87,87.95 45 top
C222  10pF  [PART]  24.96,88.97 225 top
C223  22pF, C0G, 5%  [PART]  23.33,93.59 180 top
C224  22pF, C0G, 5%  [PART]  22.85,89.55 90 top
C225  DNP  [PART]  23.61,89.55 90 top
C226  9pF  [PART]  26.86,97.2 270 top
C227  9pF  [PART]  31.67,96.26 270 top
C228  10nF  [PART]  27.07,84.55 0 top
C229  0.1uF  [PART]  28.87,87.18 0 bottom
C230  0.1uF  [PART]  36.87,88.08 180 bottom
C231  0.1uF  [PART]  54.24,3.02 270 top
C232  0.1uF  [PART]  49.44,6.32 0 top
C233  2.2uF  [_0402MP]  52.21,3.05 180 top
C234  2.2uF  [_0402MP]  49.21,3.83 180 top
C235  0.47uF  [PART]  49.36,2.31 180 top
C236  0.1uF  [PART]  50.73,4.45 90 bottom
C237  0.1uF  [PART]  53.53,13.97 180 top
C238  0.1uF  [PART]  52.59,12.37 0 top
C239  0.1uF  [PART]  49.41,5.02 0 top
C240  0.1uF  [PART]  53.27,13.11 180 top
C241  10uF  [_0402MP]  44.84,14.96 180 top
C242  10uF  [_0402MP]  45.86,14.12 0 top
C243  0.1uF  [PART]  47.71,3.15 180 top
C244  10pF  [PART]  44.41,5.79 45 top
C245  10pF  [PART]  45.5,6.81 225 top
C246  22pF, C0G, 5%  [PART]  43.87,11.43 180 top
C247  22pF, C0G, 5%  [PART]  43.39,7.39 90 top
C248  DNP  [PART]  44.15,7.39 90 top
C249  9pF  [PART]  47.4,15.04 270 top
C250  9pF  [PART]  52.21,14.1 270 top
C251  10nF  [PART]  47.61,2.39 0 top
C252  0.1uF  [PART]  49.41,5.02 0 bottom
C253  0.1uF  [PART]  57.41,5.92 180 bottom
C254  0.1uF  [PART]  54.24,23.56 270 top
C255  0.1uF  [PART]  49.44,26.86 0 top
C256  2.2uF  [_0402MP]  52.21,23.59 180 top
C257  2.2uF  [_0402MP]  49.21,24.37 180 top
C258  0.47uF  [PART]  49.36,22.85 180 top
C259  0.1uF  [PART]  50.73,24.99 90 bottom
C260  0.1uF  [PART]  53.53,34.51 180 top
C261  0.1uF  [PART]  52.59,32.91 0 top
C262  0.1uF  [PART]  49.41,25.56 0 top
C263  0.1uF  [PART]  53.27,33.65 180 top
C264  10uF  [_0402MP]  44.84,35.5 180 top
C265  10uF  [_0402MP]  45.86,34.66 0 top
C266  0.1uF  [PART]  47.71,23.69 180 top
C267  10pF  [PART]  44.41,26.33 45 top
C268  10pF  [PART]  45.5,27.35 225 top
C269  22pF, C0G, 5%  [PART]  43.87,31.97 180 top
C270  22pF, C0G, 5%  [PART]  43.39,27.93 90 top
C271  DNP  [PART]  44.15,27.93 90 top
C272  9pF  [PART]  47.4,35.58 270 top
C273  9pF  [PART]  52.21,34.64 270 top
C274  10nF  [PART]  47.61,22.93 0 top
C275  0.1uF  [PART]  49.41,25.56 0 bottom
C276  0.1uF  [PART]  57.41,26.46 180 bottom
C277  0.1uF  [PART]  54.24,44.1 270 top
C278  0.1uF  [PART]  49.44,47.4 0 top
C279  2.2uF  [_0402MP]  52.21,44.13 180 top
C280  2.2uF  [_0402MP]  49.21,44.91 180 top
C281  0.47uF  [PART]  49.36,43.39 180 top
C282  0.1uF  [PART]  50.73,45.53 90 bottom
C283  0.1uF  [PART]  53.53,55.05 180 top
C284  0.1uF  [PART]  52.59,53.45 0 top
C285  0.1uF  [PART]  49.41,46.1 0 top
C286  0.1uF  [PART]  53.27,54.19 180 top
C287  10uF  [_0402MP]  44.84,56.04 180 top
C288  10uF  [_0402MP]  45.86,55.2 0 top
C289  0.1uF  [PART]  47.71,44.23 180 top
C290  10pF  [PART]  44.41,46.87 45 top
C291  10pF  [PART]  45.5,47.89 225 top
C292  22pF, C0G, 5%  [PART]  43.87,52.51 180 top
C293  22pF, C0G, 5%  [PART]  43.39,48.47 90 top
C294  DNP  [PART]  44.15,48.47 90 top
C295  9pF  [PART]  47.4,56.12 270 top
C296  9pF  [PART]  52.21,55.18 270 top
C297  10nF  [PART]  47.61,43.47 0 top
C298  0.1uF  [PART]  49.41,46.1 0 bottom
C299  0.1uF  [PART]  57.41,47 180 bottom
C300  0.1uF  [PART]  54.24,64.64 270 top
C301  0.1uF  [PART]  49.44,67.94 0 top
C302  2.2uF  [_0402MP]  52.21,64.67 180 top
C303  2.2uF  [_0402MP]  49.21,65.45 180 top
C304  0.47uF  [PART]  49.36,63.93 180 top
C305  0.1uF  [PART]  50.73,66.07 90 bottom
C306  0.1uF  [PART]  53.53,75.59 180 top
C307  0.1uF  [PART]  52.59,73.99 0 top
C308  0.1uF  [PART]  49.41,66.64 0 top
C309  0.1uF  [PART]  53.27,74.73 180 top
C310  10uF  [_0402MP]  44.84,76.58 180 top
C311  10uF  [_0402MP]  45.86,75.74 0 top
C312  0.1uF  [PART]  47.71,64.77 180 top
C313  10pF  [PART]  44.41,67.41 45 top
C314  10pF  [PART]  45.5,68.43 225 top
C315  22pF, C0G, 5%  [PART]  43.87,73.05 180 top
C316  22pF, C0G, 5%  [PART]  43.39,69.01 90 top
C317  DNP  [PART]  44.15,69.01 90 top
C318  9pF  [PART]  47.4,76.66 270 top
C319  9pF  [PART]  52.21,75.72 270 top
C320  10nF  [PART]  47.61,64.01 0 top
C321  0.1uF  [PART]  49.41,66.64 0 bottom
C322  0.1uF  [PART]  57.41,67.54 180 bottom
C323  0.1uF  [PART]  54.24,85.18 270 top
C324  0.1uF  [PART]  49.44,88.48 0 top
C325  2.2uF  [_0402MP]  52.21,85.21 180 top
C326  2.2uF  [_0402MP]  49.21,85.99 180 top
C327  0.47uF  [PART]  49.36,84.47 180 top
C328  0.1uF  [PART]  50.73,86.61 90 bottom
C329  0.1uF  [PART]  53.53,96.13 180 top
C330  0.1uF  [PART]  52.59,94.53 0 top
C331  0.1uF  [PART]  49.41,87.18 0 top
C332  0.1uF  [PART]  53.27,95.27 180 top
C333  10uF  [_0402MP]  44.84,97.12 180 top
C334  10uF  [_0402MP]  45.86,96.28 0 top
C335  0.1uF  [PART]  47.71,85.31 180 top
C336  10pF  [PART]  44.41,87.95 45 top
C337  10pF  [PART]  45.5,88.97 225 top
C338  22pF, C0G, 5%  [PART]  43.87,93.59 180 top
C339  22pF, C0G, 5%  [PART]  43.39,89.55 90 top
C340  DNP  [PART]  44.15,89.55 90 top
C341  9pF  [PART]  47.4,97.2 270 top
C342  9pF  [PART]  52.21,96.26 270 top
C343  10nF  [PART]  47.61,84.55 0 top
C344  0.1uF  [PART]  49.41,87.18 0 bottom
C345  0.1uF  [PART]  57.41,88.08 180 bottom
C346  0.1uF  [PART]  74.78,3.02 270 top
C347  0.1uF  [PART]  69.98,6.32 0 top
C348  2.2uF  [_0402MP]  72.75,3.05 180 top
C349  2.2uF  [_0402MP]  69.75,3.83 180 top
C350  0.47uF  [PART]  69.9,2.31 180 top
C351  0.1uF  [PART]  71.27,4.45 90 bottom
C352  0.1uF  [PART]  74.07,13.97 180 top
C353  0.1uF  [PART]  73.13,12.37 0 top
C354  0.1uF  [PART]  69.95,5.02 0 top
C355  0.1uF  [PART]  73.81,13.11 180 top
C356  10uF  [_0402MP]  65.38,14.96 180 top
C357  10uF  [_0402MP]  66.4,14.12 0 top
C358  0.1uF  [PART]  68.25,3.15 180 top
C359  10pF  [PART]  64.95,5.79 45 top
C360  10pF  [PART]  66.04,6.81 225 top
C361  22pF, C0G, 5%  [PART]  64.41,11.43 180 top
C362  22pF, C0G, 5%  [PART]  63.93,7.39 90 top
C363  DNP  [PART]  64.69,7.39 90 top
C364  9pF  [PART]  67.94,15.04 270 top
C365  9pF  [PART]  72.75,14.1 270 top
C366  10nF  [PART]  68.15,2.39 0 top
C367  0.1uF  [PART]  69.95,5.02 0 bottom
C368  0.1uF  [PART]  77.95,5.92 180 bottom
C369  0.1uF  [PART]  74.78,23.56 270 top
C370  0.1uF  [PART]  69.98,26.86 0 top
C371  2.2uF  [_0402MP]  72.75,23.59 180 top
C372  2.2uF  [_0402MP]  69.75,24.37 180 top
C373  0.47uF  [PART]  69.9,22.85 180 top
C374  0.1uF  [PART]  71.27,24.99 90 bottom
C375  0.1uF  [PART]  74.07,34.51 180 top
C376  0.1uF  [PART]  73.13,32.91 0 top
C377  0.1uF  [PART]  69.95,25.56 0 top
C378  0.1uF  [PART]  73.81,33.65 180 top
C379  10uF  [_0402MP]  65.38,35.5 180 top
C380  10uF  [_0402MP]  66.4,34.66 0 top
C381  0.1uF  [PART]  68.25,23.69 180 top
C382  10pF  [PART]  64.95,26.33 45 top
C383  10pF  [PART]  66.04,27.35 225 top
C384  22pF, C0G, 5%  [PART]  64.41,31.97 180 top
C385  22pF, C0G, 5%  [PART]  63.93,27.93 90 top
C386  DNP  [PART]  64.69,27.93 90 top
C387  9pF  [PART]  67.94,35.58 270 top
C388  9pF  [PART]  72.75,34.64 270 top
C389  10nF  [PART]  68.15,22.93 0 top
C390  0.1uF  [PART]  69.95,25.56 0 bottom
C391  0.1uF  [PART]  77.95,26.46 180 bottom
C392  0.1uF  [PART]  74.78,44.1 270 top
C393  0.1uF  [PART]  69.98,47.4 0 top
C394  2.2uF  [_0402MP]  72.75,44.13 180 top
C395  2.2uF  [_0402MP]  69.75,44.91 180 top
C396  0.47uF  [PART]  69.9,43.39 180 top
C397  0.1uF  [PART]  71.27,45.53 90 bottom
C398  0.1uF  [PART]  74.07,55.05 180 top
C399  0.1uF  [PART]  73.13,53.45 0 top
C400  0.1uF  [PART]  69.95,46.1 0 top
C401  0.1uF  [PART]  73.81,54.19 180 top
C402  10uF  [_0402MP]  65.38,56.04 180 top
C403  10uF  [_0402MP]  66.4,55.2 0 top
C404  0.1uF  [PART]  68.25,44.23 180 top
C405  10pF  [PART]  64.95,46.87 45 top
C406  10pF  [PART]  66.04,47.89 225 top
C407  22pF, C0G, 5%  [PART]  64.41,52.51 180 top
C408  22pF, C0G, 5%  [PART]  63.93,48.47 90 top
C409  DNP  [PART]  64.69,48.47 90 top
C410  9pF  [PART]  67.94,56.12 270 top
C411  9pF  [PART]  72.75,55.18 270 top
C412  10nF  [PART]  68.15,43.47 0 top
C413  0.1uF  [PART]  69.95,46.1 0 bottom
C414  0.1uF  [PART]  77.95,47 180 bottom
C415  0.1uF  [PART]  74.78,64.64 270 top
C416  0.1uF  [PART]  69.98,67.94 0 top
C417  2.2uF  [_0402MP]  72.75,64.67 180 top
C418  2.2uF  [_0402MP]  69.75,65.45 180 top
C419  0.47uF  [PART]  69.9,63.93 180 top
C420  0.1uF  [PART]  71.27,66.07 90 bottom
C421  0.1uF  [PART]  74.07,75.59 180 top
C422  0.1uF  [PART]  73.13,73.99 0 top
C423  0.1uF  [PART]  69.95,66.64 0 top
C424  0.1uF  [PART]  73.81,74.73 180 top
C425  10uF  [_0402MP]  65.38,76.58 180 top
C426  10uF  [_0402MP]  66.4,75.74 0 top
C427  0.1uF  [PART]  68.25,64.77 180 top
C428  10pF  [PART]  64.95,67.41 45 top
C429  10pF  [PART]  66.04,68.43 225 top
C430  22pF, C0G, 5%  [PART]  64.41,73.05 180 top
C431  22pF, C0G, 5%  [PART]  63.93,69.01 90 top
C432  DNP  [PART]  64.69,69.01 90 top
C433  9pF  [PART]  67.94,76.66 270 top
C434  9pF  [PART]  72.75,75.72 270 top
C435  10nF  [PART]  68.15,64.01 0 top
C436  0.1uF  [PART]  69.95,66.64 0 bottom
C437  0.1uF  [PART]  77.95,67.54 180 bottom
C438  0.1uF  [PART]  74.78,85.18 270 top
C439  0.1uF  [PART]  69.98,88.48 0 top
C440  2.2uF  [_0402MP]  72.75,85.21 180 top
C441  2.2uF  [_0402MP]  69.75,85.99 180 top
C442  0.47uF  [PART]  69.9,84.47 180 top
C443  0.1uF  [PART]  71.27,86.61 90 bottom
C444  0.1uF  [PART]  74.07,96.13 180 top
C445  0.1uF  [PART]  73.13,94.53 0 top
C446  0.1uF  [PART]  69.95,87.18 0 top
C447  0.1uF  [PART]  73.81,95.27 180 top
C448  10uF  [_0402MP]  65.38,97.12 180 top
C449  10uF  [_0402MP]  66.4,96.28 0 top
C450  0.1uF  [PART]  68.25,85.31 180 top
C451  10pF  [PART]  64.95,87.95 45 top
C452  10pF  [PART]  66.04,88.97 225 top
C453  22pF, C0G, 5%  [PART]  64.41,93.59 180 top
C454  22pF, C0G, 5%  [PART]  63.93,89.55 90 top
C455  DNP  [PART]  64.69,89.55 90 top
C456  9pF  [PART]  67.94,97.2 270 top
C457  9pF  [PART]  72.75,96.26 270 top
C458  10nF  [PART]  68.15,84.55 0 top
C459  0.1uF  [PART]  69.95,87.18 0 bottom
C460  0.1uF  [PART]  77.95,88.08 180 bottom
C461  0.1uF  [PART]  95.32,3.02 270 top
C462  0.1uF  [PART]  90.52,6.32 0 top
C463  2.2uF  [_0402MP]  93.29,3.05 180 top
C464  2.2uF  [_0402MP]  90.29,3.83 180 top
C465  0.47uF  [PART]  90.44,2.31 180 top
C466  0.1uF  [PART]  91.81,4.45 90 bottom
C467  0.1uF  [PART]  94.61,13.97 180 top
C468  0.1uF  [PART]  93.67,12.37 0 top
C469  0.1uF  [PART]  90.49,5.02 0 top
C470  0.1uF  [PART]  94.35,13.11 180 top
C471  10uF  [_0402MP]  85.92,14.96 180 top
C472  10uF  [_0402MP]  86.94,14.12 0 top
C473  0.1uF  [PART]  88.79,3.15 180 top
C474  10pF  [PART]  85.49,5.79 45 top
C475  10pF  [PART]  86.58,6.81 225 top
C476  22pF, C0G, 5%  [PART]  84.95,11.43 180 top
C477  22pF, C0G, 5%  [PART]  84.47,7.39 90 top
C478  DNP  [PART]  85.23,7.39 90 top
C479  9pF  [PART]  88.48,15.04 270 top
C480  9pF  [PART]  93.29,14.1 270 top
C481  10nF  [PART]  88.69,2.39 0 top
C482  0.1uF  [PART]  90.49,5.02 0 bottom
C483  0.1uF  [PART]  98.49,5.92 180 bottom
C484  0.1uF  [PART]  95.32,23.56 270 top
C485  0.1uF  [PART]  90.52,26.86 0 top
C486  2.2uF  [_0402MP]  93.29,23.59 180 top
C487  2.2uF  [_0402MP]  90.29,24.37 180 top
C488  0.47uF  [PART]  90.44,22.85 180 top
C489  0.1uF  [PART]  91.81,24.99 90 bottom
C490  0.1uF  [PART]  94.61,34.51 180 top
C491  0.1uF  [PART]  93.67,32.91 0 top
C492  0.1uF  [PART]  90.49,25.56 0 top
C493  0.1uF  [PART]  94.35,33.65 180 top
C494  10uF  [_0402MP]  85.92,35.5 180 top
C495  10uF  [_0402MP]  86.94,34.66 0 top
C496  0.1uF  [PART]  88.79,23.69 180 top
C497  10pF  [PART]  85.49,26.33 45 top
C498  10pF  [PART]  86.58,27.35 225 top
C499  22pF, C0G, 5%  [PART]  84.95,31.97 180 top
C500  22pF, C0G, 5%  [PART]  84.47,27.93 90 top
C501  DNP  [PART]  85.23,27.93 90 top
C502  9pF  [PART]  88.48,35.58 270 top
C503  9pF  [PART]  93.29,34.64 270 top
C504  10nF  [PART]  88.69,22.93 0 top
C505  0.1uF  [PART]  90.49,25.56 0 bottom
C506  0.1uF  [PART]  98.49,26.46 180 bottom
C507  0.1uF  [PART]  95.32,44.1 270 top
C508  0.1uF  [PART]  90.52,47.4 0 top
C509  2.2uF  [_0402MP]  93.29,44.13 180 top
C510  2.2uF  [_0402MP]  90.29,44.91 180 top
C511  0.47uF  [PART]  90.44,43.39 180 top
C512  0.1uF  [PART]  91.81,45.53 90 bottom
C513  0.1uF  [PART]  94.61,55.05 180 top
C514  0.1uF  [PART]  93.67,53.45 0 top
C515  0.1uF  [PART]  90.49,46.1 0 top
C516  0.1uF  [PART]  94.35,54.19 180 top
C517  10uF  [_0402MP]  85.92,56.04 180 top
C518  10uF  [_0402MP]  86.94,55.2 0 top
C519  0.1uF  [PART]  88.79,44.23 180 top
C520  10pF  [PART]  85.49,46.87 45 top
C521  10pF  [PART]  86.58,47.89 225 top
C522  22pF, C0G, 5%  [PART]  84.95,52.51 180 top
C523  22pF, C0G, 5%  [PART]  84.47,48.47 90 top
C524  DNP  [PART]  85.23,48.47 90 top
C525  9pF  [PART]  88.48,56.12 270 top
C526  9pF  [PART]  93.29,55.18 270 top
C527  10nF  [PART]  88.69,43.47 0 top
C528  0.1uF  [PART]  90.49,46.1 0 bottom
C529  0.1uF  [PART]  98.49,47 180 bottom
C530  0.1uF  [PART]  95.32,64.64 270 top
C531  0.1uF  [PART]  90.52,67.94 0 top
C532  2.2uF  [_0402MP]  93.29,64.67 180 top
C533  2.2uF  [_0402MP]  90.29,65.45 180 top
C534  0.47uF  [PART]  90.44,63.93 180 top
C535  0.1uF  [PART]  91.81,66.07 90 bottom
C536  0.1uF  [PART]  94.61,75.59 180 top
C537  0.1uF  [PART]  93.67,73.99 0 top
C538  0.1uF  [PART]  90.49,66.64 0 top
C539  0.1uF  [PART]  94.35,74.73 180 top
C540  10uF  [_0402MP]  85.92,76.58 180 top
C541  10uF  [_0402MP]  86.94,75.74 0 top
C542  0.1uF  [PART]  88.79,64.77 180 top
C543  10pF  [PART]  85.49,67.41 45 top
C544  10pF  [PART]  86.58,68.43 225 top
C545  22pF, C0G, 5%  [PART]  84.95,73.05 180 top
C546  22pF, C0G, 5%  [PART]  84.47,69.01 90 top
C547  DNP  [PART]  85.23,69.01 90 top
C548  9pF  [PART]  88.48,76.66 270 top
C549  9pF  [PART]  93.29,75.72 270 top
C550  10nF  [PART]  88.69,64.01 0 top
C551  0.1uF  [PART]  90.49,66.64 0 bottom
C552  0.1uF  [PART]  98.49,67.54 180 bottom
C553  0.1uF  [PART]  95.32,85.18 270 top
C554  0.1uF  [PART]  90.52,88.48 0 top
C555  2.2uF  [_0402MP]  93.29,85.21 180 top
C556  2.2uF  [_0402MP]  90.29,85.99 180 top
C557  0.47uF  [PART]  90.44,84.47 180 top
C558  0.1uF  [PART]  91.81,86.61 90 bottom
C559  0.1uF  [PART]  94.61,96.13 180 top
C560  0.1uF  [PART]  93.67,94.53 0 top
C561  0.1uF  [PART]  90.49,87.18 0 top
C562  0.1uF  [PART]  94.35,95.27 180 top
C563  10uF  [_0402MP]  85.92,97.12 180 top
C564  10uF  [_0402MP]  86.94,96.28 0 top
C565  0.1uF  [PART]  88.79,85.31 180 top
C566  10pF  [PART]  85.49,87.95 45 top
C567  10pF  [PART]  86.58,88.97 225 top
C568  22pF, C0G, 5%  [PART]  84.95,93.59 180 top
C569  22pF, C0G, 5%  [PART]  84.47,89.55 90 top
C570  DNP  [PART]  85.23,89.55 90 top
C571  9pF  [PART]  88.48,97.2 270 top
C572  9pF  [PART]  93.29,96.26 270 top
C573  10nF  [PART]  88.69,84.55 0 top
C574  0.1uF  [PART]  90.49,87.18 0 bottom
C575  0.1uF  [PART]  98.49,88.08 180 bottom
FB1  [_0603MP]  11.58,5 180 top
FB2  [_0603MP]  11.58,25.54 180 top
FB3  [_0603MP]  11.58,46.08 180 top
FB4  [_0603MP]  11.58,66.62 180 top
FB5  [_0603MP]  11.58,87.16 180 top
FB6  [_0603MP]  32.12,5 180 top
FB7  [_0603MP]  32.12,25.54 180 top
FB8  [_0603MP]  32.12,46.08 180 top
FB9  [_0603MP]  32.12,66.62 180 top
FB10  [_0603MP]  32.12,87.16 180 top
FB11  [_0603MP]  52.66,5 180 top
FB12  [_0603MP]  52.66,25.54 180 top
FB13  [_0603MP]  52.66,46.08 180 top
FB14  [_0603MP]  52.66,66.62 180 top
FB15  [_0603MP]  52.66,87.16 180 top
FB16  [_0603MP]  73.2,5 180 top
FB17  [_0603MP]  73.2,25.54 180 top
FB18  [_0603MP]  73.2,46.08 180 top
FB19  [_0603MP]  73.2,66.62 180 top
FB20  [_0603MP]  73.2,87.16 180 top
FB21  [_0603MP]  93.74,5 180 top
FB22  [_0603MP]  93.74,25.54 180 top
FB23  [_0603MP]  93.74,46.08 180 top
FB24  [_0603MP]  93.74,66.62 180 top
FB25  [_0603MP]  93.74,87.16 180 top
IC  ATSAMR21E18A-MUT  [QFN32]  7.81,9.92 270 top
IC1  ATSAMR21E18A-MUT  [QFN32]  7.81,30.46 270 top
IC2  ATSAMR21E18A-MUT  [QFN32]  7.81,51 270 top
IC3  ATSAMR21E18A-MUT  [QFN32]  7.81,71.54 270 top
IC4  ATSAMR21E18A-MUT  [QFN32]  7.81,92.08 270 top
IC5  ATSAMR21E18A-MUT  [QFN32]  28.35,9.92 270 top
IC6  ATSAMR21E18A-MUT  [QFN32]  28.35,30.46 270 top
IC7  ATSAMR21E18A-MUT  [QFN32]  28.35,51 270 top
IC8  ATSAMR21E18A-MUT  [QFN32]  28.35,71.54 270 top
IC9  ATSAMR21E18A-MUT  [QFN32]  28.35,92.08 270 top
IC10  ATSAMR21E18A-MUT  [QFN32]  48.89,9.92 270 top
IC11  ATSAMR21E18A-MUT  [QFN32]  48.89,30.46 270 top
IC12  ATSAMR21E18A-MUT  [QFN32]  48.89,51 270 top
IC13  ATSAMR21E18A-MUT  [QFN32]  48.89,71.54 270 top
IC14  ATSAMR21E18A-MUT  [QFN32]  48.89,92.08 270 top
IC15  ATSAMR21E18A-MUT  [QFN32]  69.43,9.92 270 top
IC16  ATSAMR21E18A-MUT  [QFN32]  69.43,30.46 270 top
IC17  ATSAMR21E18A-MUT  [QFN32]  69.43,51 270 top
IC18  ATSAMR21E18A-MUT  [QFN32]  69.43,71.54 270 top
IC19  ATSAMR21E18A-MUT  [QFN32]  69.43,92.08 270 top
IC20  ATSAMR21E18A-MUT  [QFN32]  89.97,9.92 270 top
IC21  ATSAMR21E18A-MUT  [QFN32]  89.97,30.46 270 top
IC22  ATSAMR21E18A-MUT  [QFN32]  89.97,51 270 top
IC23  ATSAMR21E18A-MUT  [QFN32]  89.97,71.54 270 top
IC24  ATSAMR21E18A-MUT  [QFN32]  89.97,92.08 270 top
IMU  MPU-9250  [QFN_3X3MM]  11.49,8.37 0 bottom
IMU1  MPU-9250  [QFN_3X3MM]  11.49,28.91 0 bottom
IMU2  MPU-9250  [QFN_3X3MM]  11.49,49.45 0 bottom
IMU3  MPU-9250  [QFN_3X3MM]  11.49,69.98 0 bottom
IMU4  MPU-9250  [QFN_3X3MM]  11.49,90.53 0 bottom
IMU5  MPU-9250  [QFN_3X3MM]  32.03,8.37 0 bottom
IMU6  MPU-9250  [QFN_3X3MM]  32.03,28.91 0 bottom
IMU7  MPU-9250  [QFN_3X3MM]  32.03,49.45 0 bottom
IMU8  MPU-9250  [QFN_3X3MM]  32.03,69.98 0 bottom
IMU9  MPU-9250  [QFN_3X3MM]  32.03,90.53 0 bottom
IMU10  MPU-9250  [QFN_3X3MM]  52.57,8.37 0 bottom
IMU11  MPU-9250  [QFN_3X3MM]  52.57,28.91 0 bottom
IMU12  MPU-9250  [QFN_3X3MM]  52.57,49.45 0 bottom
IMU13  MPU-9250  [QFN_3X3MM]  52.57,69.98 0 bottom
IMU14  MPU-9250  [QFN_3X3MM]  52.57,90.53 0 bottom
IMU15  MPU-9250  [QFN_3X3MM]  73.11,8.37 0 bottom
IMU16  MPU-9250  [QFN_3X3MM]  73.11,28.91 0 bottom
IMU17  MPU-9250  [QFN_3X3MM]  73.11,49.45 0 bottom
IMU18  MPU-9250  [QFN_3X3MM]  73.11,69.98 0 bottom
IMU19  MPU-9250  [QFN_3X3MM]  73.11,90.53 0 bottom
IMU20  MPU-9250  [QFN_3X3MM]  93.65,8.37 0 bottom
IMU21  MPU-9250  [QFN_3X3MM]  93.65,28.91 0 bottom
IMU22  MPU-9250  [QFN_3X3MM]  93.65,49.45 0 bottom
IMU23  MPU-9250  [QFN_3X3MM]  93.65,69.98 0 bottom
IMU24  MPU-9250  [QFN_3X3MM]  93.65,90.53 0 bottom
L1  10uH  [_0603MP]  3.89,33.72 0 top
L2  10uH  [_0603MP]  3.89,54.26 0 top
L3  10uH  [_0603MP]  3.89,74.8 0 top
L4  10uH  [_0603MP]  3.89,95.34 0 top
L5  10uH  [_0603MP]  24.43,13.18 0 top
L6  10uH  [_0603MP]  3.89,13.18 0 top
L7  10uH  [_0603MP]  24.43,33.72 0 top
L8  10uH  [_0603MP]  24.43,54.26 0 top
L9  10uH  [_0603MP]  24.43,74.8 0 top
L10  10uH  [_0603MP]  24.43,95.34 0 top
L11  10uH  [_0603MP]  44.97,13.18 0 top
L12  10uH  [_0603MP]  44.97,33.72 0 top
L13  10uH  [_0603MP]  44.97,54.26 0 top
L14  10uH  [_0603MP]  44.97,74.8 0 top
L15  10uH  [_0603MP]  44.97,95.34 0 top
L16  10uH  [_0603MP]  65.51,13.18 0 top
L17  10uH  [_0603MP]  65.51,33.72 0 top
L18  10uH  [_0603MP]  65.51,54.26 0 top
L19  10uH  [_0603MP]  65.51,74.8 0 top
L20  10uH  [_0603MP]  65.51,95.34 0 top
L21  10uH  [_0603MP]  86.05,13.18 0 top
L22  10uH  [_0603MP]  86.05,33.72 0 top
L23  10uH  [_0603MP]  86.05,54.26 0 top
L24  10uH  [_0603MP]  86.05,74.8 0 top
L25  10uH  [_0603MP]  86.05,95.34 0 top
LDO_VREG  MCP1700T-3302E/TT  [MCP1700T-3302E/TT]  9.64,3.07 90 top
LDO_VREG1  MCP1700T-3302E/TT  [MCP1700T-3302E/TT]  9.64,23.61 90 top
LDO_VREG2  MCP1700T-3302E/TT  [MCP1700T-3302E/TT]  9.64,44.15 90 top
LDO_VREG3  MCP1700T-3302E/TT  [MCP1700T-3302E/TT]  9.64,64.69 90 top
LDO_VREG4  MCP1700T-3302E/TT  [MCP1700T-3302E/TT]  9.64,85.23 90 top
LDO_VREG5  MCP1700T-3302E/TT  [MCP1700T-3302E/TT]  30.18,3.07 90 top
LDO_VREG6  MCP1700T-3302E/TT  [MCP1700T-3302E/TT]  30.18,23.61 90 top
LDO_VREG7  MCP1700T-3302E/TT  [MCP1700T-3302E/TT]  30.18,44.15 90 top
LDO_VREG8  MCP1700T-3302E/TT  [MCP1700T-3302E/TT]  30.18,64.69 90 top
LDO_VREG9  MCP1700T-3302E/TT  [MCP1700T-3302E/TT]  30.18,85.23 90 top
LDO_VREG10  MCP1700T-3302E/TT  [MCP1700T-3302E/TT]  50.72,3.07 90 top
LDO_VREG11  MCP1700T-3302E/TT  [MCP1700T-3302E/TT]  50.72,23.61 90 top
LDO_VREG12  MCP1700T-3302E/TT  [MCP1700T-3302E/TT]  50.72,44.15 90 top
LDO_VREG13  MCP1700T-3302E/TT  [MCP1700T-3302E/TT]  50.72,64.69 90 top
LDO_VREG14  MCP1700T-3302E/TT  [MCP1700T-3302E/TT]  50.72,85.23 90 top
LDO_VREG15  MCP1700T-3302E/TT  [MCP1700T-3302E/TT]  71.26,3.07 90 top
LDO_VREG16  MCP1700T-3302E/TT  [MCP1700T-3302E/TT]  71.26,23.61 90 top
LDO_VREG17  MCP1700T-3302E/TT  [MCP1700T-3302E/TT]  71.26,44.15 90 top
LDO_VREG18  MCP1700T-3302E/TT  [MCP1700T-3302E/TT]  71.26,64.69 90 top
LDO_VREG19  MCP1700T-3302E/TT  [MCP1700T-3302E/TT]  71.26,85.23 90 top
LDO_VREG20  MCP1700T-3302E/TT  [MCP1700T-3302E/TT]  91.8,3.07 90 top
LDO_VREG21  MCP1700T-3302E/TT  [MCP1700T-3302E/TT]  91.8,23.61 90 top
LDO_VREG22  MCP1700T-3302E/TT  [MCP1700T-3302E/TT]  91.8,44.15 90 top
LDO_VREG23  MCP1700T-3302E/TT  [MCP1700T-3302E/TT]  91.8,64.69 90 top
LDO_VREG24  MCP1700T-3302E/TT  [MCP1700T-3302E/TT]  91.8,85.23 90 top
LED  BLUE  [CHIPLED_0603_NOOUTLINE]  13.21,15.29 270 top
LED1  BLUE  [CHIPLED_0603_NOOUTLINE]  13.21,35.83 270 top
LED2  BLUE  [CHIPLED_0603_NOOUTLINE]  13.21,56.37 270 top
LED3  BLUE  [CHIPLED_0603_NOOUTLINE]  13.21,76.91 270 top
LED4  BLUE  [CHIPLED_0603_NOOUTLINE]  13.21,97.45 270 top
LED5  BLUE  [CHIPLED_0603_NOOUTLINE]  33.75,15.29 270 top
LED6  BLUE  [CHIPLED_0603_NOOUTLINE]  33.75,35.83 270 top
LED7  BLUE  [CHIPLED_0603_NOOUTLINE]  33.75,56.37 270 top
LED8  BLUE  [CHIPLED_0603_NOOUTLINE]  33.75,76.91 270 top
LED9  BLUE  [CHIPLED_0603_NOOUTLINE]  33.75,97.45 270 top
LED10  BLUE  [CHIPLED_0603_NOOUTLINE]  54.29,15.29 270 top
LED11  BLUE  [CHIPLED_0603_NOOUTLINE]  54.29,35.83 270 top
LED12  BLUE  [CHIPLED_0603_NOOUTLINE]  54.29,56.37 270 top
LED13  BLUE  [CHIPLED_0603_NOOUTLINE]  54.29,76.91 270 top
LED14  BLUE  [CHIPLED_0603_NOOUTLINE]  54.29,97.45 270 top
LED15  BLUE  [CHIPLED_0603_NOOUTLINE]  74.83,15.29 270 top
LED16  BLUE  [CHIPLED_0603_NOOUTLINE]  74.83,35.83 270 top
LED17  BLUE  [CHIPLED_0603_NOOUTLINE]  74.83,56.37 270 top
LED18  BLUE  [CHIPLED_0603_NOOUTLINE]  74.83,76.91 270 top
LED19  BLUE  [CHIPLED_0603_NOOUTLINE]  74.83,97.45 270 top
LED20  BLUE  [CHIPLED_0603_NOOUTLINE]  95.37,15.29 270 top
LED21  BLUE  [CHIPLED_0603_NOOUTLINE]  95.37,35.83 270 top
LED22  BLUE  [CHIPLED_0603_NOOUTLINE]  95.37,56.37 270 top
LED23  BLUE  [CHIPLED_0603_NOOUTLINE]  95.37,76.91 270 top
LED24  BLUE  [CHIPLED_0603_NOOUTLINE]  95.37,97.45 270 top
R1  330  [PART]  12.65,4.06 180 top
R2  10K  [PART]  12.32,3.02 270 top
R3  330  [PART]  12.65,24.6 180 top
R4  330  [PART]  11.51,15.65 270 top
R5  10K  [PART]  12.32,23.56 270 top
R6  330  [PART]  11.51,36.19 270 top
R7  2.2K  [PART]  9.7,34.31 90 bottom
R8  2.2K  [PART]  9.7,13.77 90 bottom
R9  2.2K  [PART]  8.74,13.77 90 bottom
R10  2.2K  [PART]  8.74,34.31 90 bottom
R11  330  [PART]  12.65,45.14 180 top
R12  10K  [PART]  12.32,44.1 270 top
R13  330  [PART]  11.51,56.73 270 top
R14  2.2K  [PART]  9.7,54.85 90 bottom
R15  2.2K  [PART]  8.74,54.85 90 bottom
R16  330  [PART]  12.65,65.68 180 top
R17  10K  [PART]  12.32,64.64 270 top
R18  330  [PART]  11.51,77.27 270 top
R19  2.2K  [PART]  9.7,75.39 90 bottom
R20  2.2K  [PART]  8.74,75.39 90 bottom
R21  330  [PART]  12.65,86.22 180 top
R22  10K  [PART]  12.32,85.18 270 top
R23  330  [PART]  11.51,97.81 270 top
R24  2.2K  [PART]  9.7,95.93 90 bottom
R25  2.2K  [PART]  8.74,95.93 90 bottom
R26  330  [PART]  33.19,4.06 180 top
R27  10K  [PART]  32.86,3.02 270 top
R28  330  [PART]  32.05,15.65 270 top
R29  2.2K  [PART]  30.24,13.77 90 bottom
R30  2.2K  [PART]  29.28,13.77 90 bottom
R31  330  [PART]  33.19,24.6 180 top
R32  10K  [PART]  32.86,23.56 270 top
R33  330  [PART]  32.05,36.19 270 top
R34  2.2K  [PART]  30.24,34.31 90 bottom
R35  2.2K  [PART]  29.28,34.31 90 bottom
R36  330  [PART]  33.19,45.14 180 top
R37  10K  [PART]  32.86,44.1 270 top
R38  330  [PART]  32.05,56.73 270 top
R39  2.2K  [PART]  30.24,54.85 90 bottom
R40  2.2K  [PART]  29.28,54.85 90 bottom
R41  330  [PART]  33.19,65.68 180 top
R42  10K  [PART]  32.86,64.64 270 top
R43  330  [PART]  32.05,77.27 270 top
R44  2.2K  [PART]  30.24,75.39 90 bottom
R45  2.2K  [PART]  29.28,75.39 90 bottom
R46  330  [PART]  33.19,86.22 180 top
R47  10K  [PART]  32.86,85.18 270 top
R48  330  [PART]  32.05,97.81 270 top
R49  2.2K  [PART]  30.24,95.93 90 bottom
R50  2.2K  [PART]  29.28,95.93 90 bottom
R51  330  [PART]  53.73,4.06 180 top
R52  10K  [PART]  53.4,3.02 270 top
R53  330  [PART]  52.59,15.65 270 top
R54  2.2K  [PART]  50.78,13.77 90 bottom
R55  2.2K  [PART]  49.82,13.77 90 bottom
R56  330  [PART]  53.73,24.6 180 top
R57  10K  [PART]  53.4,23.56 270 top
R58  330  [PART]  52.59,36.19 270 top
R59  2.2K  [PART]  50.78,34.31 90 bottom
R60  2.2K  [PART]  49.82,34.31 90 bottom
R61  330  [PART]  53.73,45.14 180 top
R62  10K  [PART]  53.4,44.1 270 top
R63  330  [PART]  52.59,56.73 270 top
R64  2.2K  [PART]  50.78,54.85 90 bottom
R65  2.2K  [PART]  49.82,54.85 90 bottom
R66  330  [PART]  53.73,65.68 180 top
R67  10K  [PART]  53.4,64.64 270 top
R68  330  [PART]  52.59,77.27 270 top
R69  2.2K  [PART]  50.78,75.39 90 bottom
R70  2.2K  [PART]  49.82,75.39 90 bottom
R71  330  [PART]  53.73,86.22 180 top
R72  10K  [PART]  53.4,85.18 270 top
R73  330  [PART]  52.59,97.81 270 top
R74  2.2K  [PART]  50.78,95.93 90 bottom
R75  2.2K  [PART]  49.82,95.93 90 bottom
R76  330  [PART]  74.27,4.06 180 top
R77  10K  [PART]  73.94,3.02 270 top
R78  330  [PART]  73.13,15.65 270 top
R79  2.2K  [PART]  71.32,13.77 90 bottom
R80  2.2K  [PART]  70.36,13.77 90 bottom
R81  330  [PART]  74.27,24.6 180 top
R82  10K  [PART]  73.94,23.56 270 top
R83  330  [PART]  73.13,36.19 270 top
R84  2.2K  [PART]  71.32,34.31 90 bottom
R85  2.2K  [PART]  70.36,34.31 90 bottom
R86  330  [PART]  74.27,45.14 180 top
R87  10K  [PART]  73.94,44.1 270 top
R88  330  [PART]  73.13,56.73 270 top
R89  2.2K  [PART]  71.32,54.85 90 bottom
R90  2.2K  [PART]  70.36,54.85 90 bottom
R91  330  [PART]  74.27,65.68 180 top
R92  10K  [PART]  73.94,64.64 270 top